# Altium PCB PAYL0006_PC_Overview_Block.PcbDoc (part 1 of 2)
Units mm, origin at the board's own origin, x right, y up, seen from the top; angles counter-clockwise.
Board outline 116.4 x 100.9 mm, 6 copper layers (Top Layer, MidLayer1, VSUP1_PLANE, GND_PLANE, VSUP3_PLANE, Bottom Layer); 172 components, 183 nets, 811 pads, 237 vias.
Unrouted connection lines stored in the file: 35.
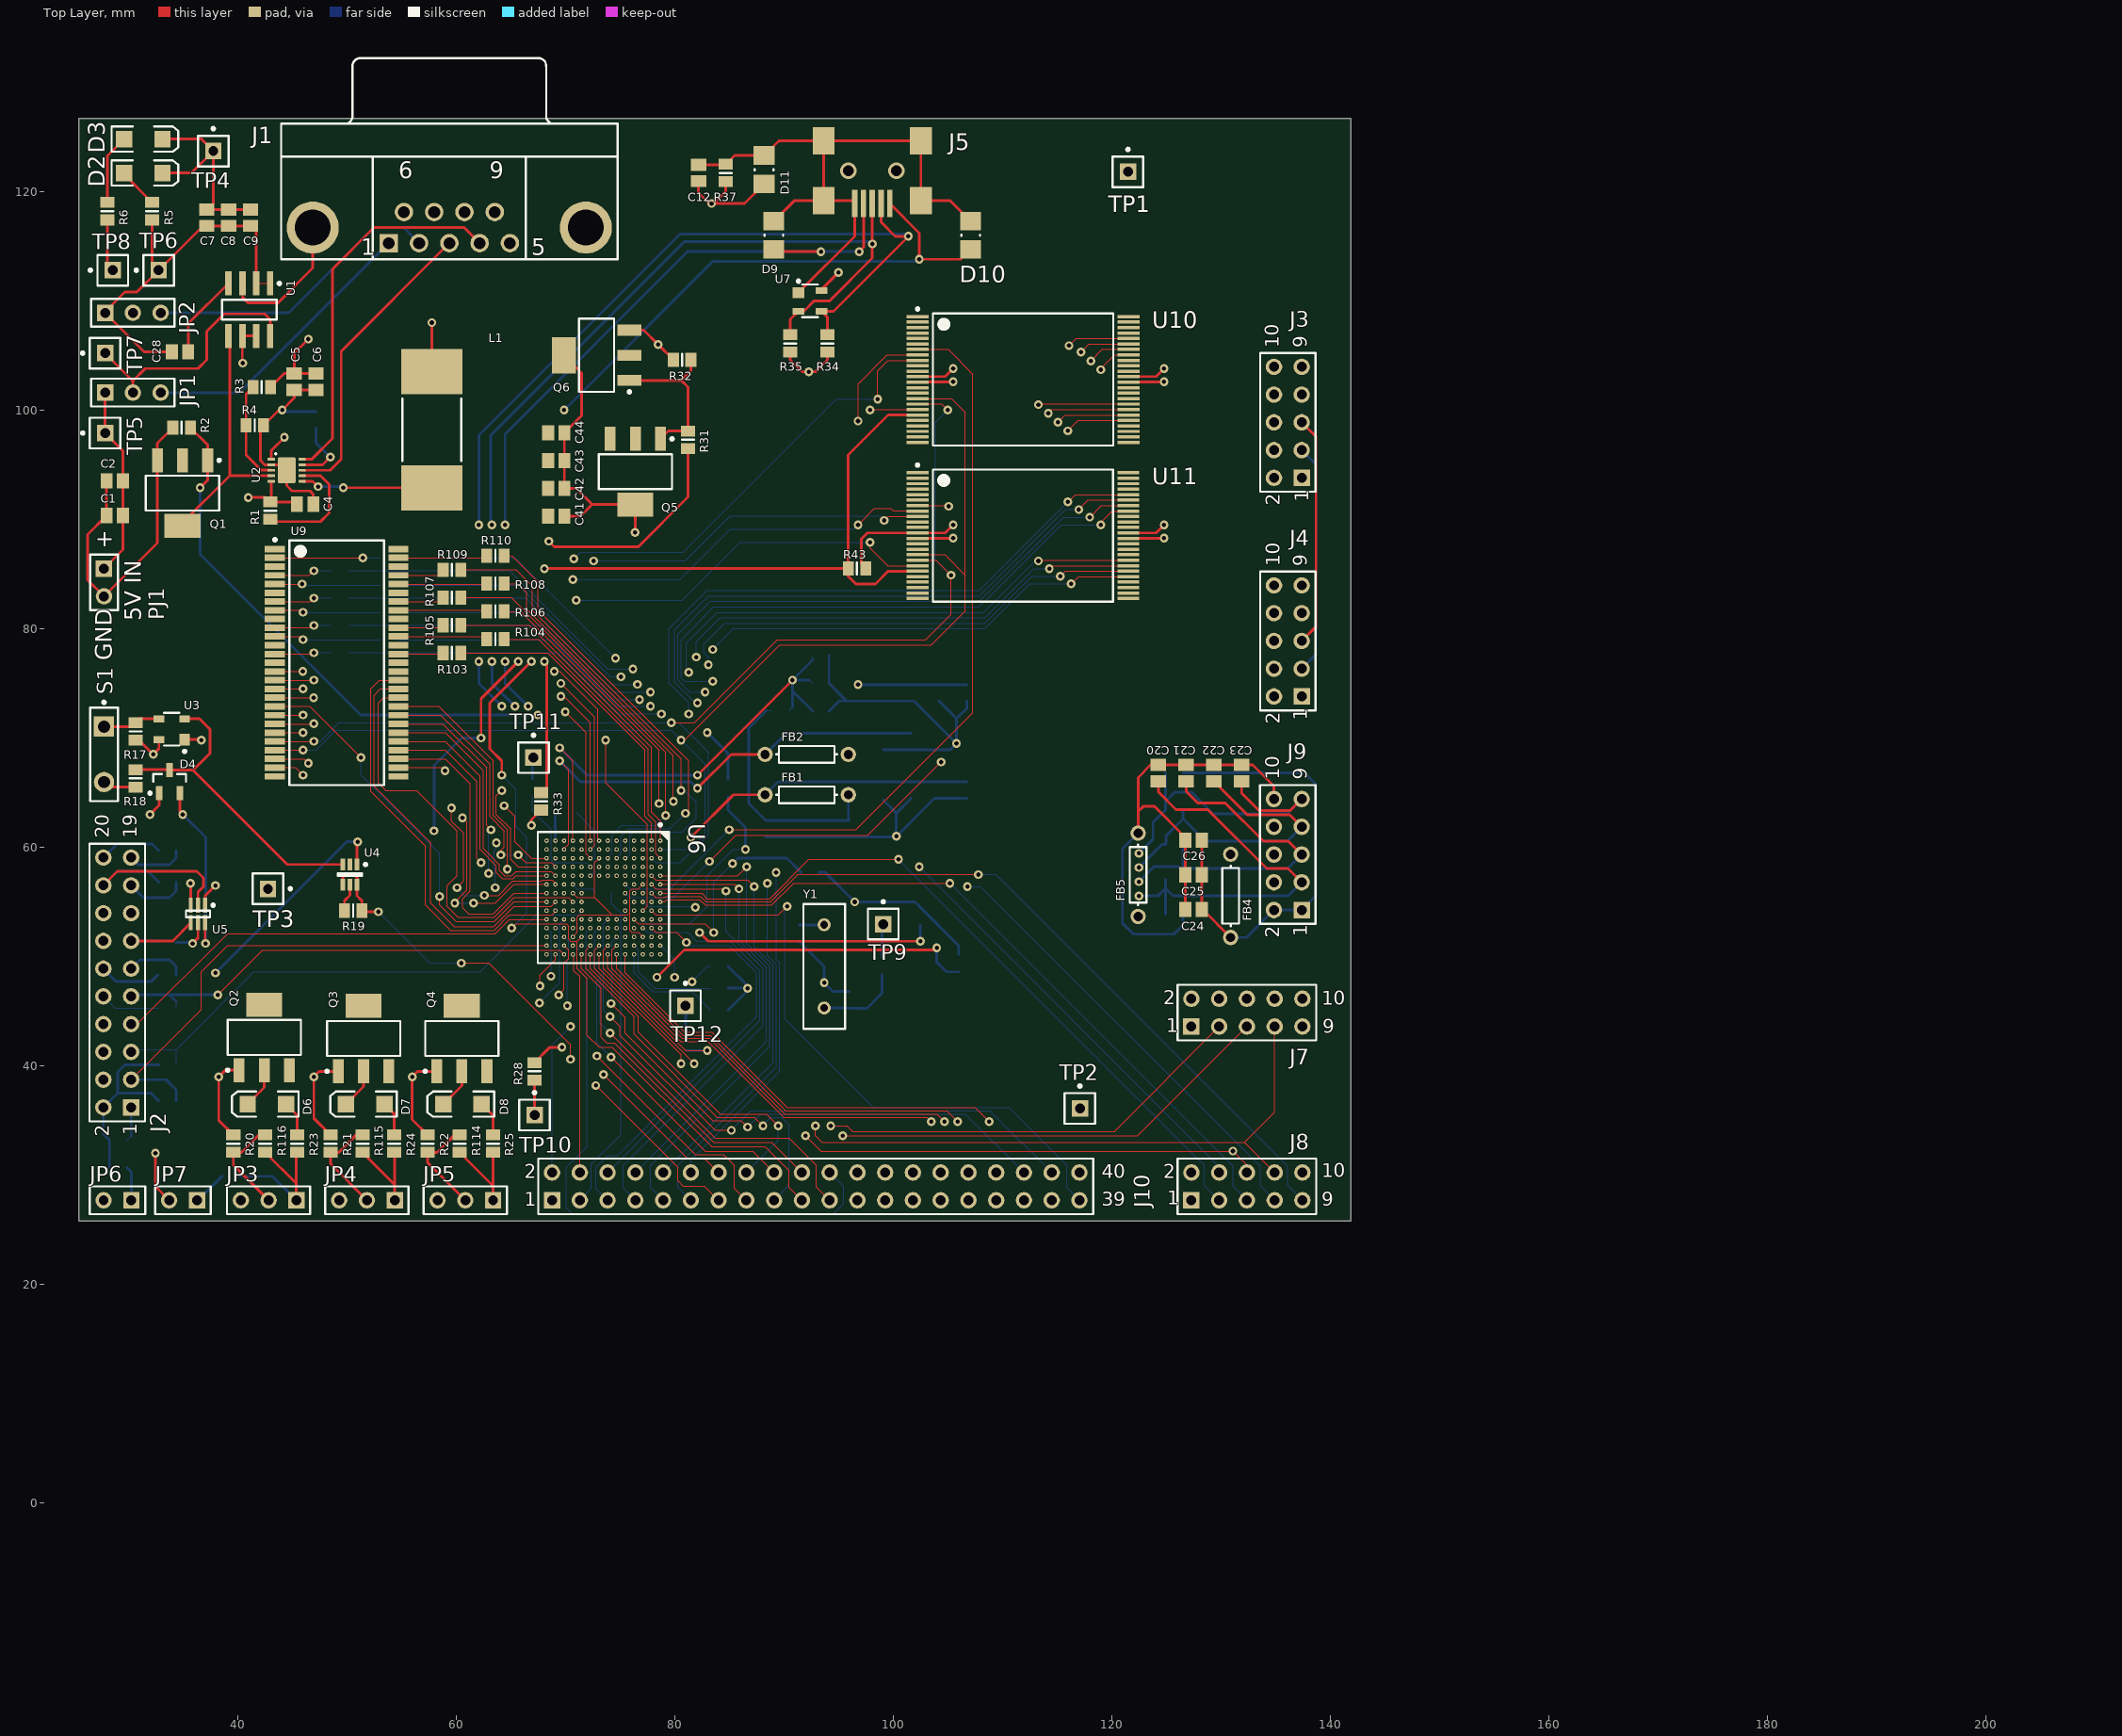
[diagram p0: Top Layer view]
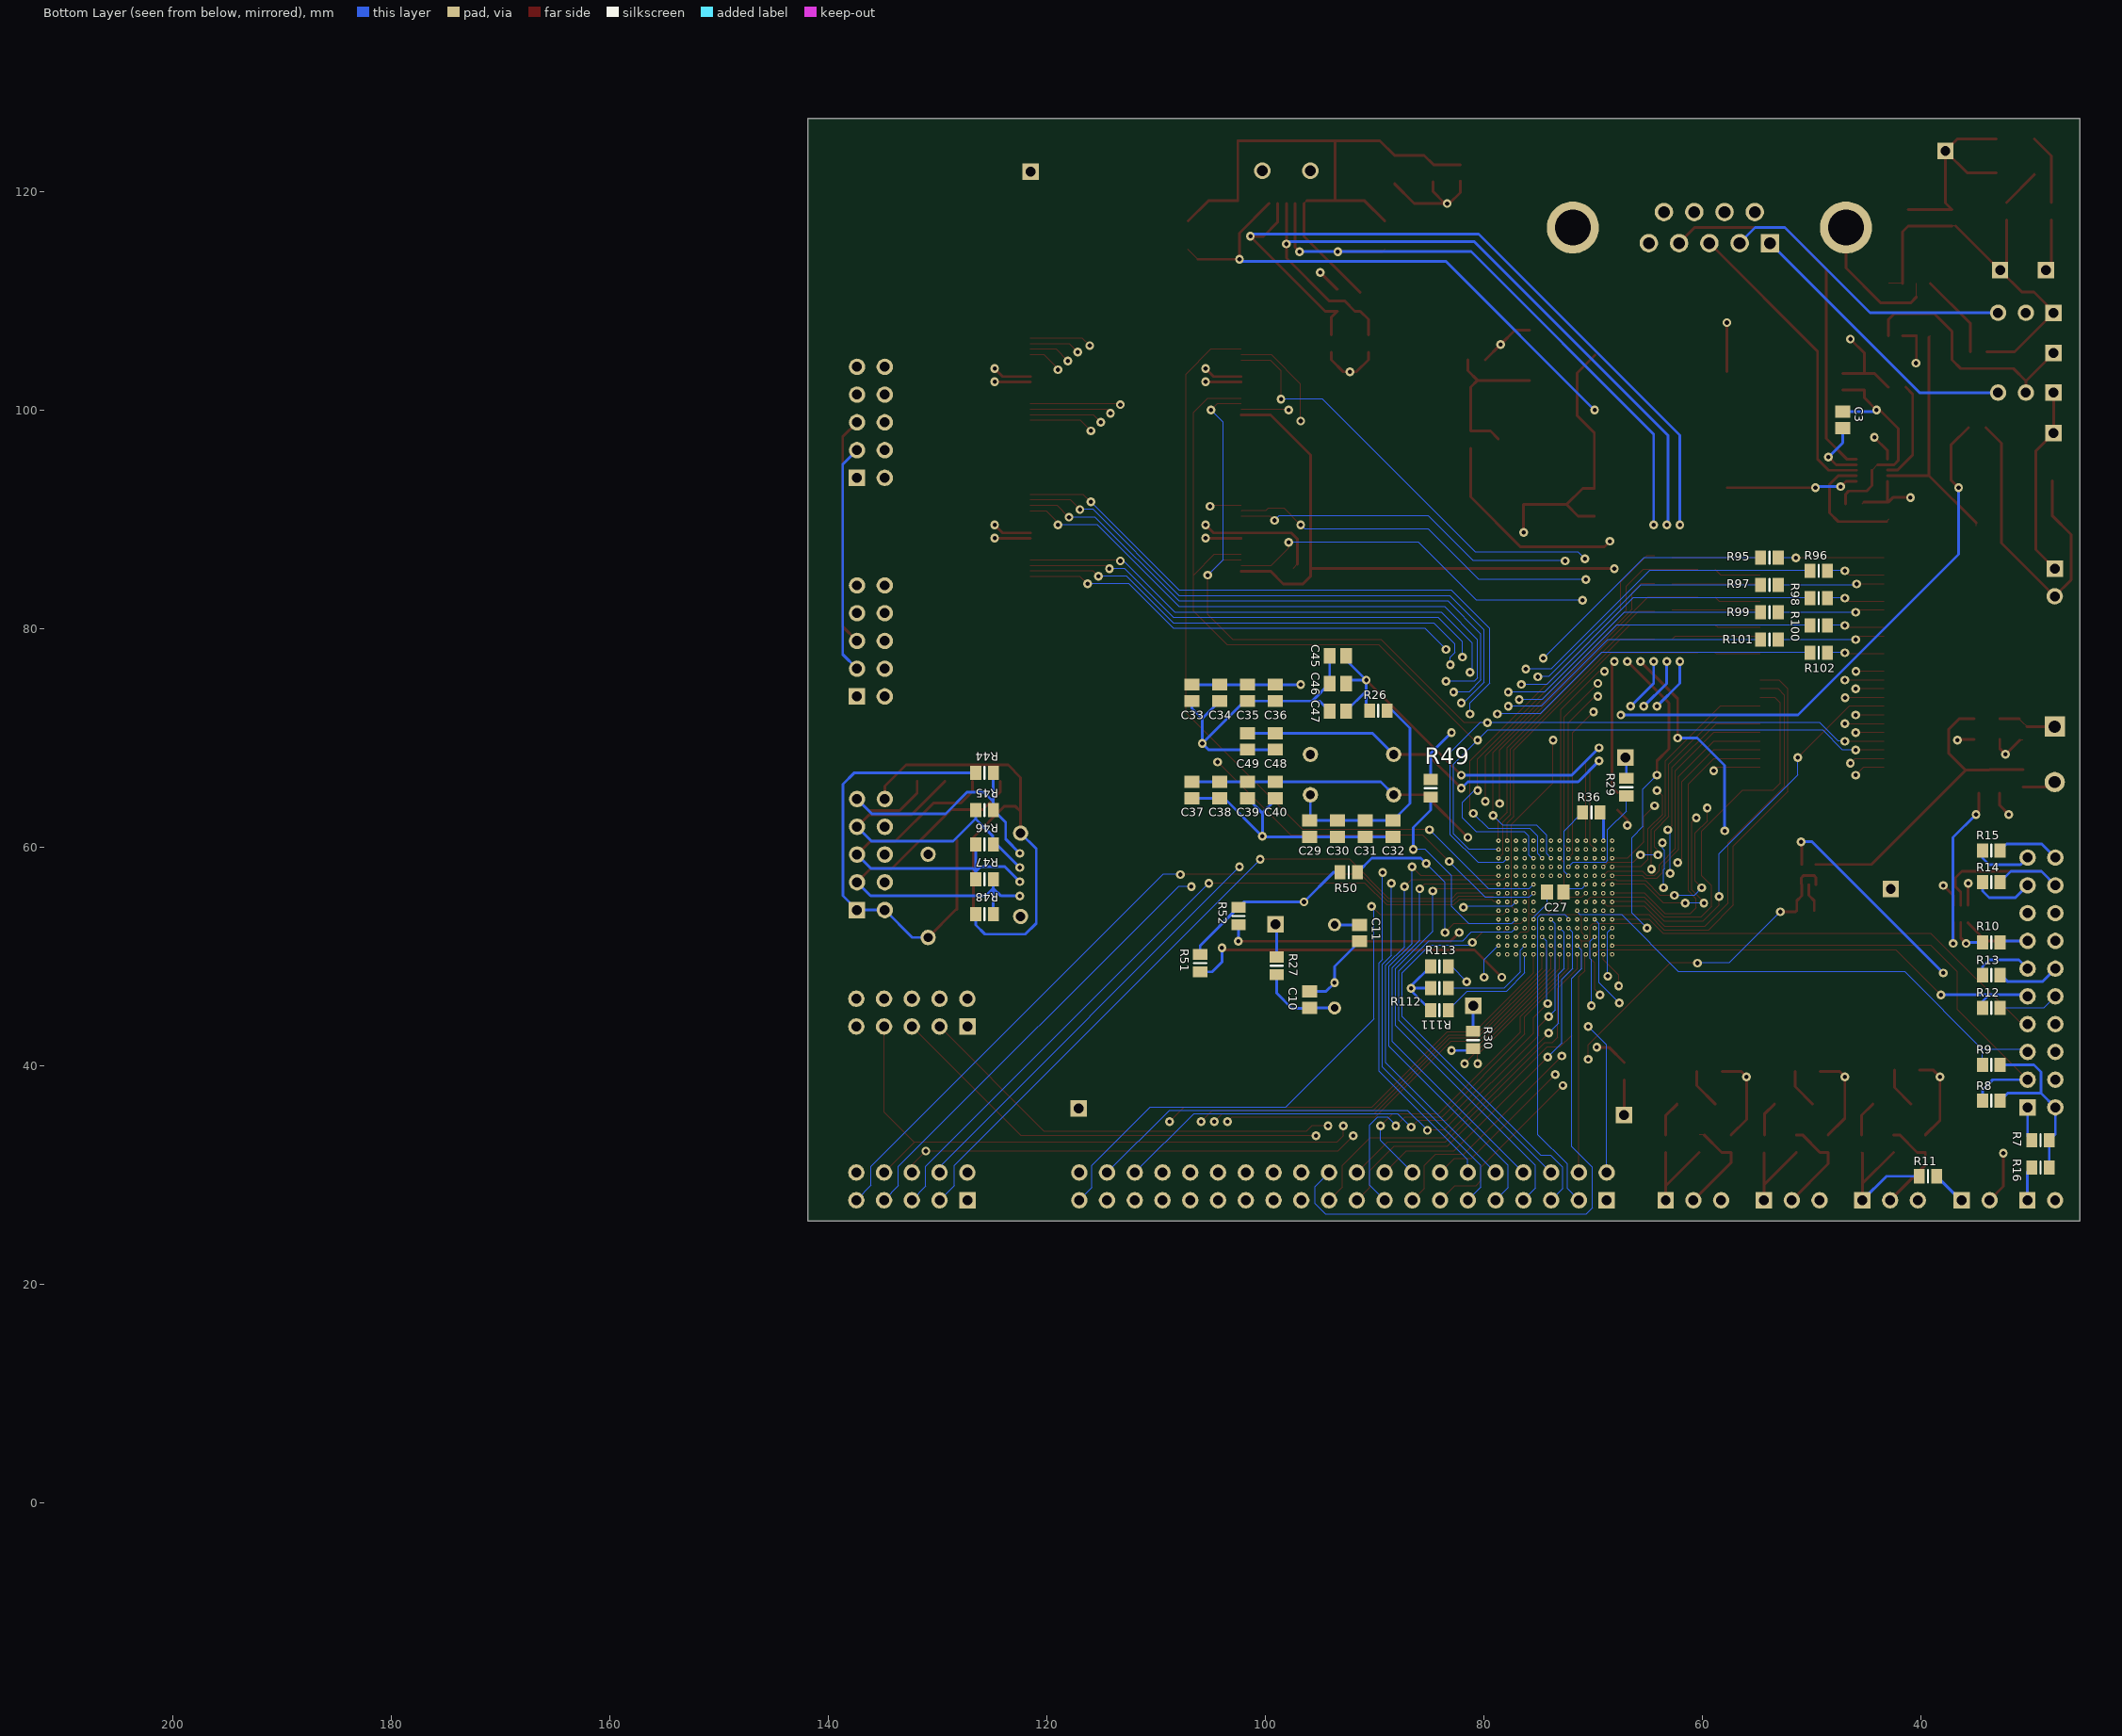
[diagram p1: Bottom Layer view, seen from below]
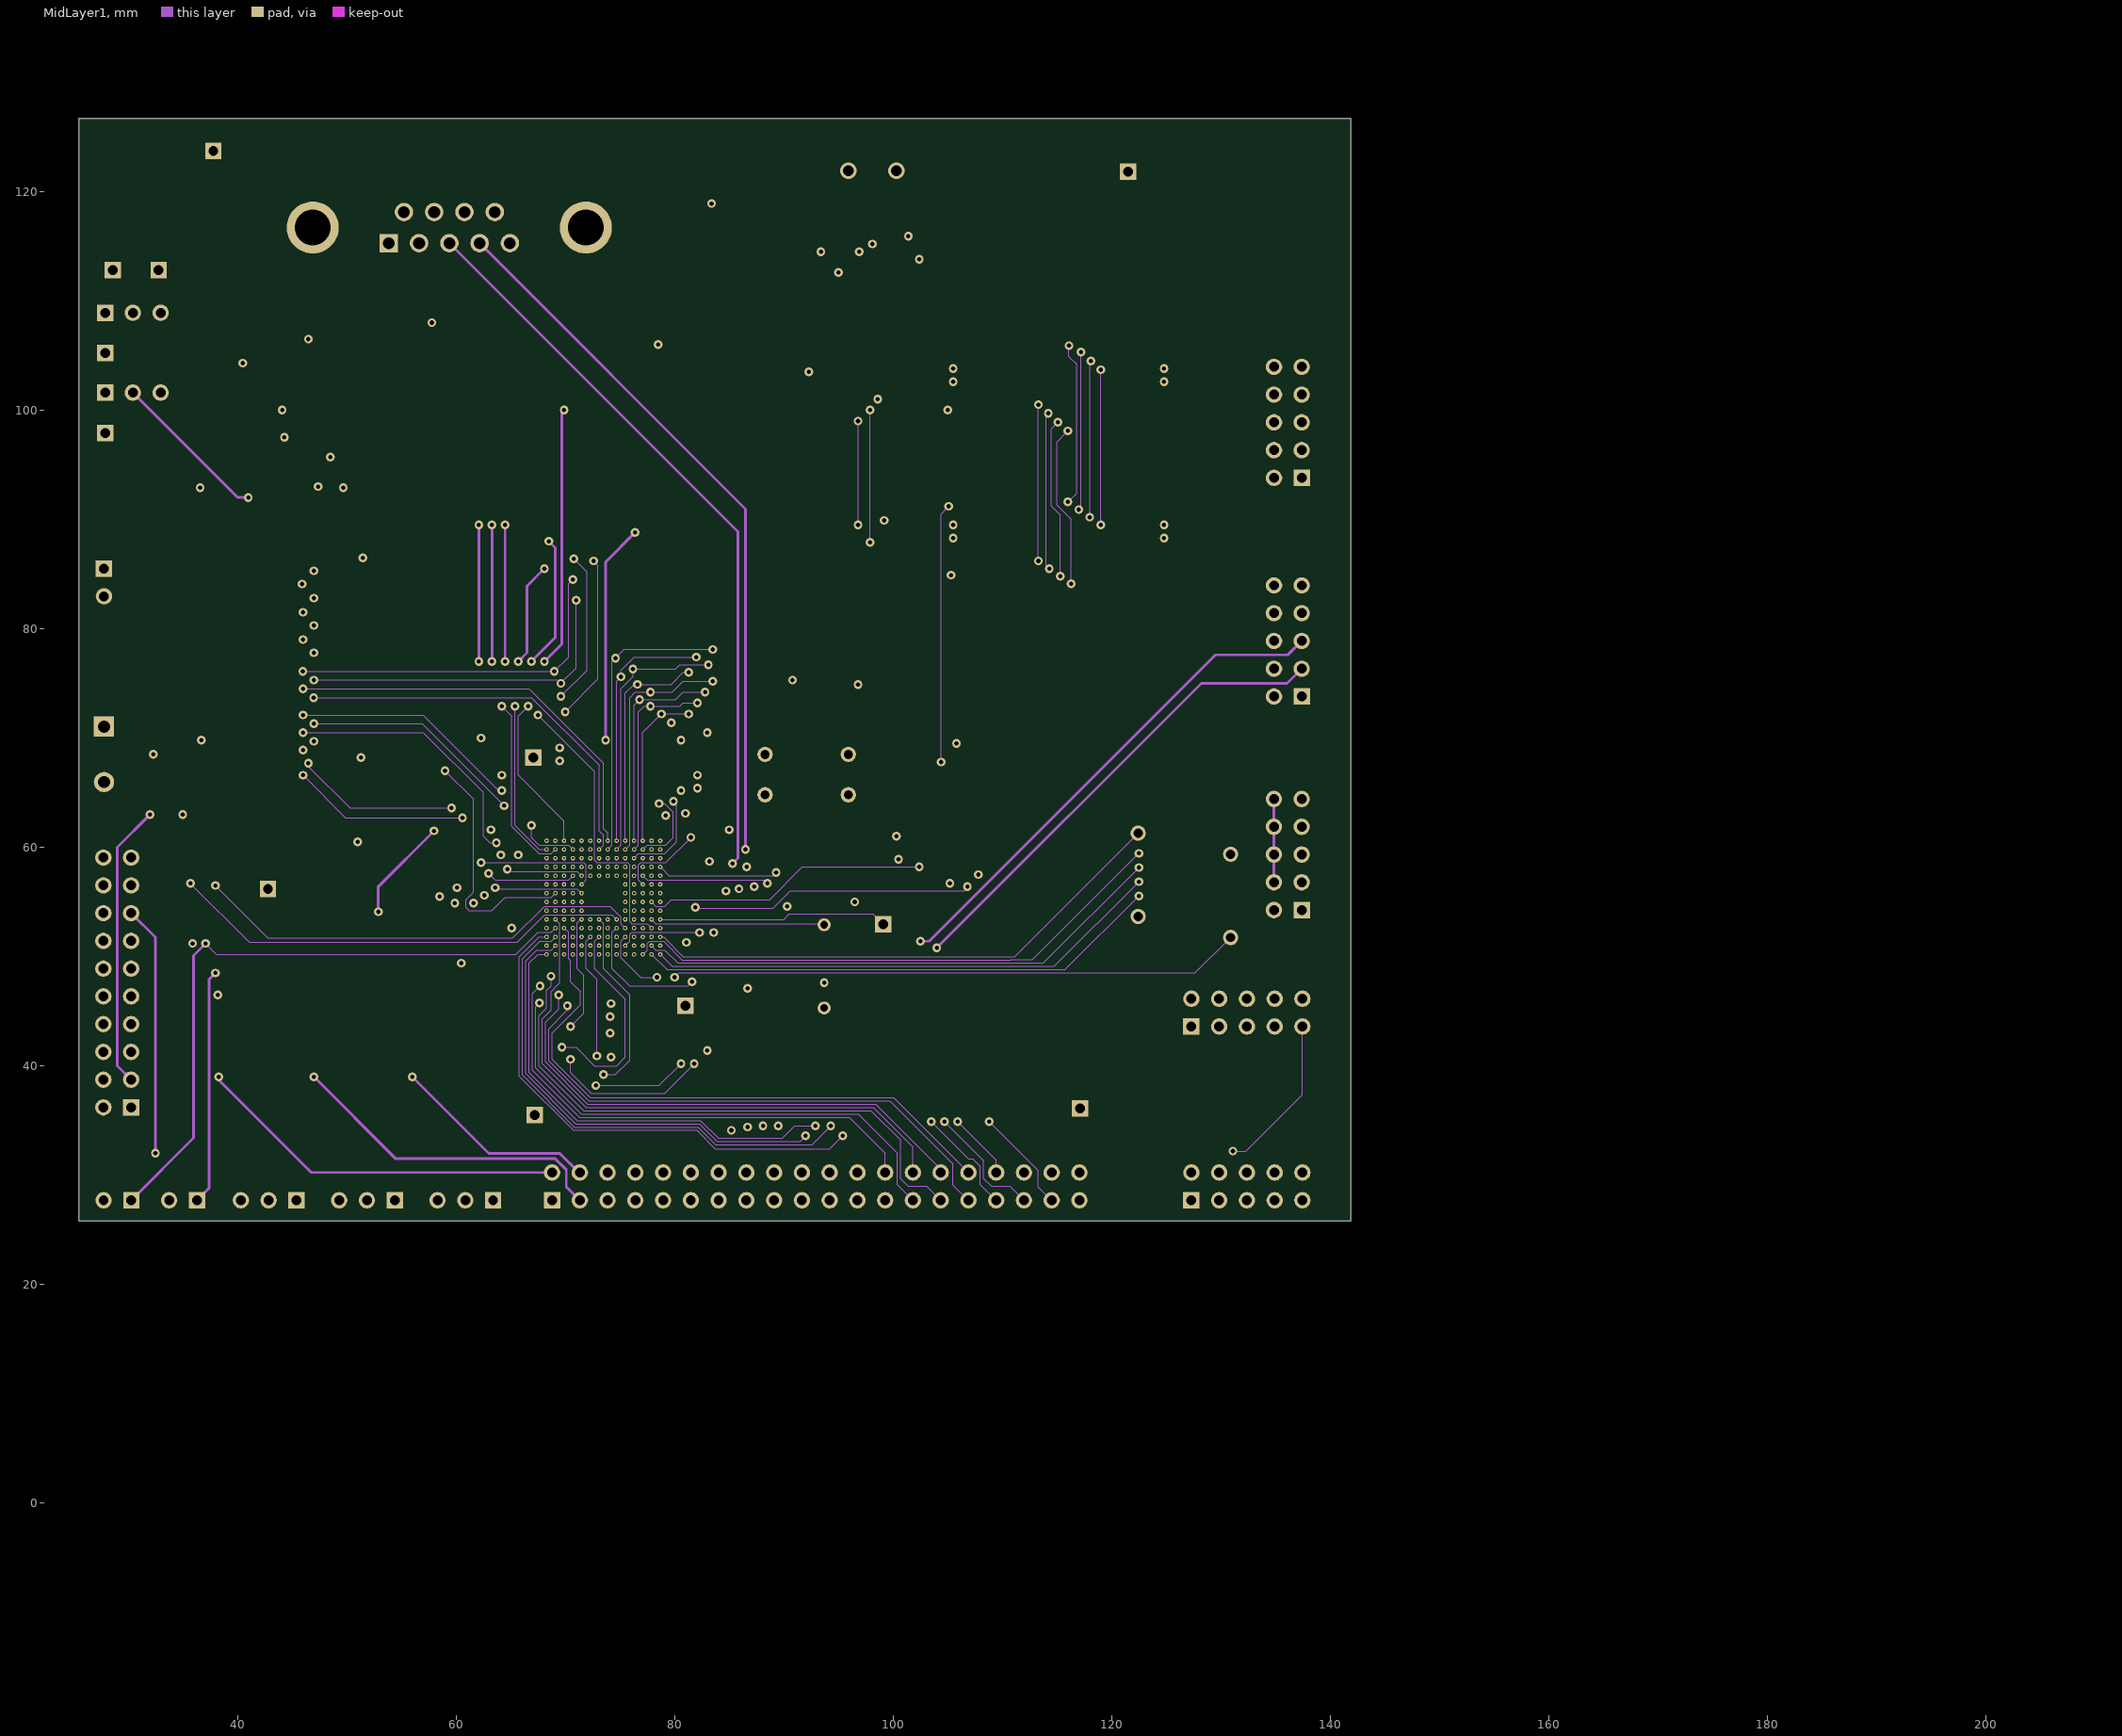
[diagram p2: MidLayer1]
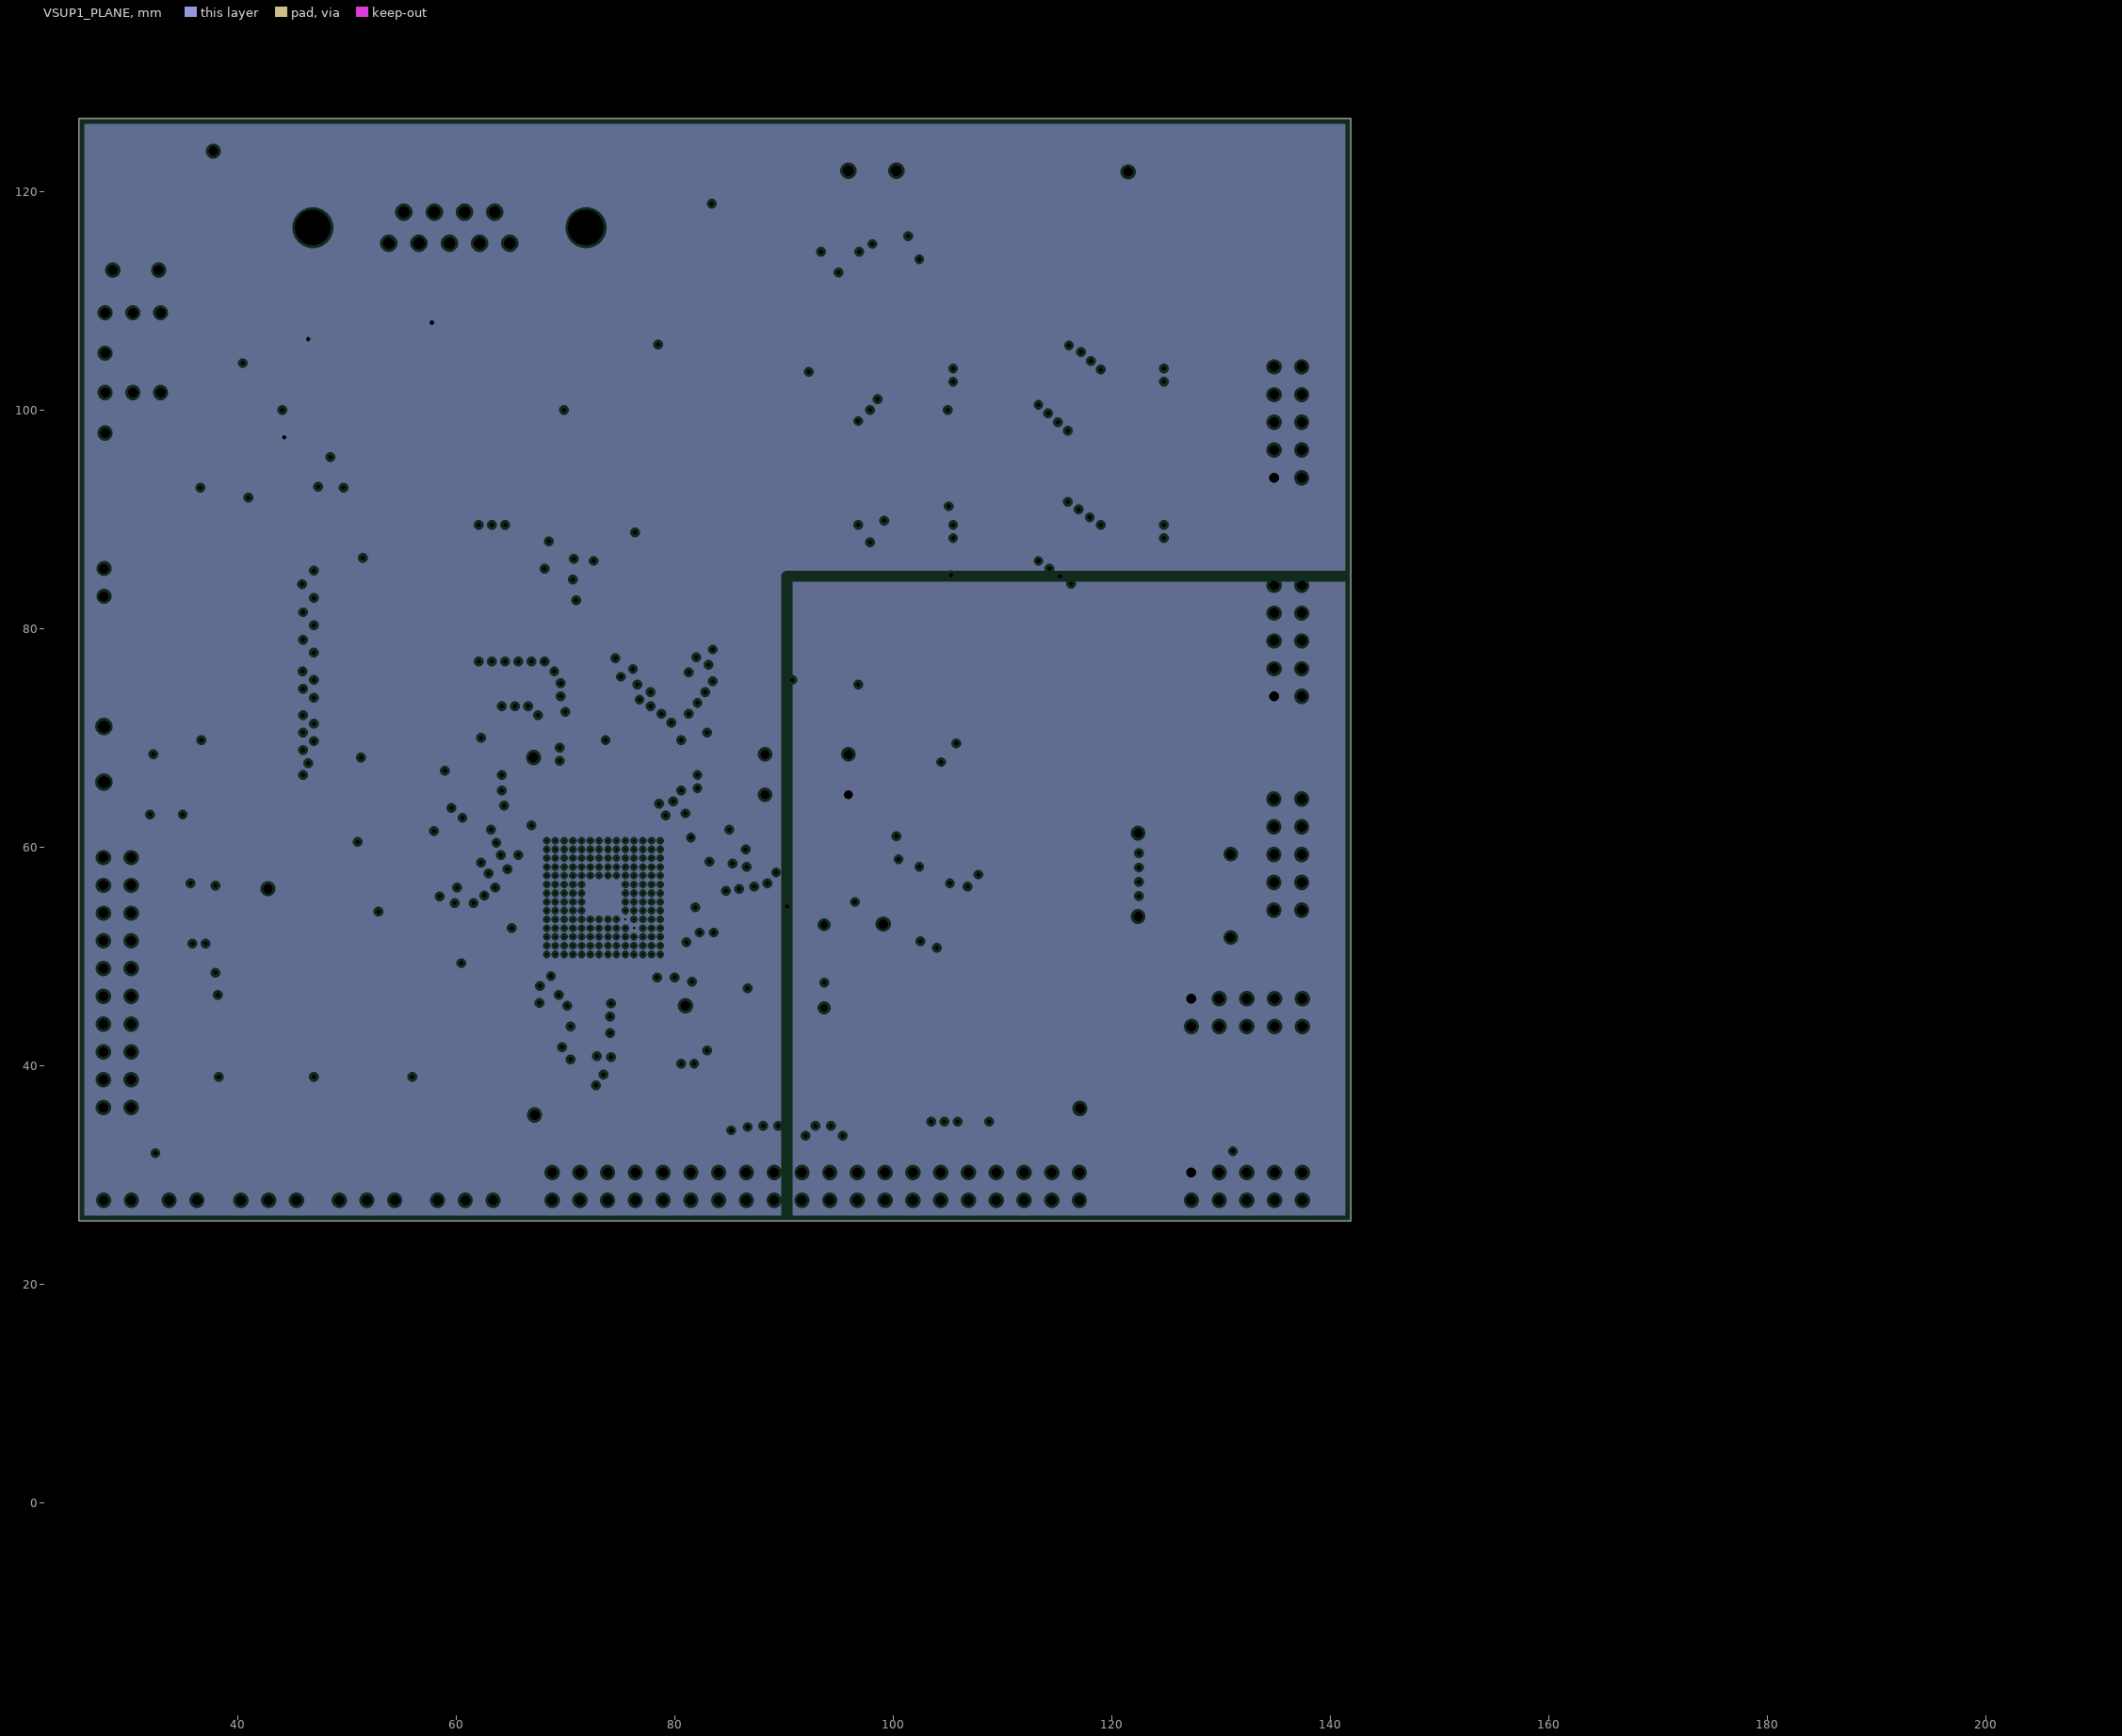
[diagram p3: VSUP1_PLANE, clearances drawn from the general rule]
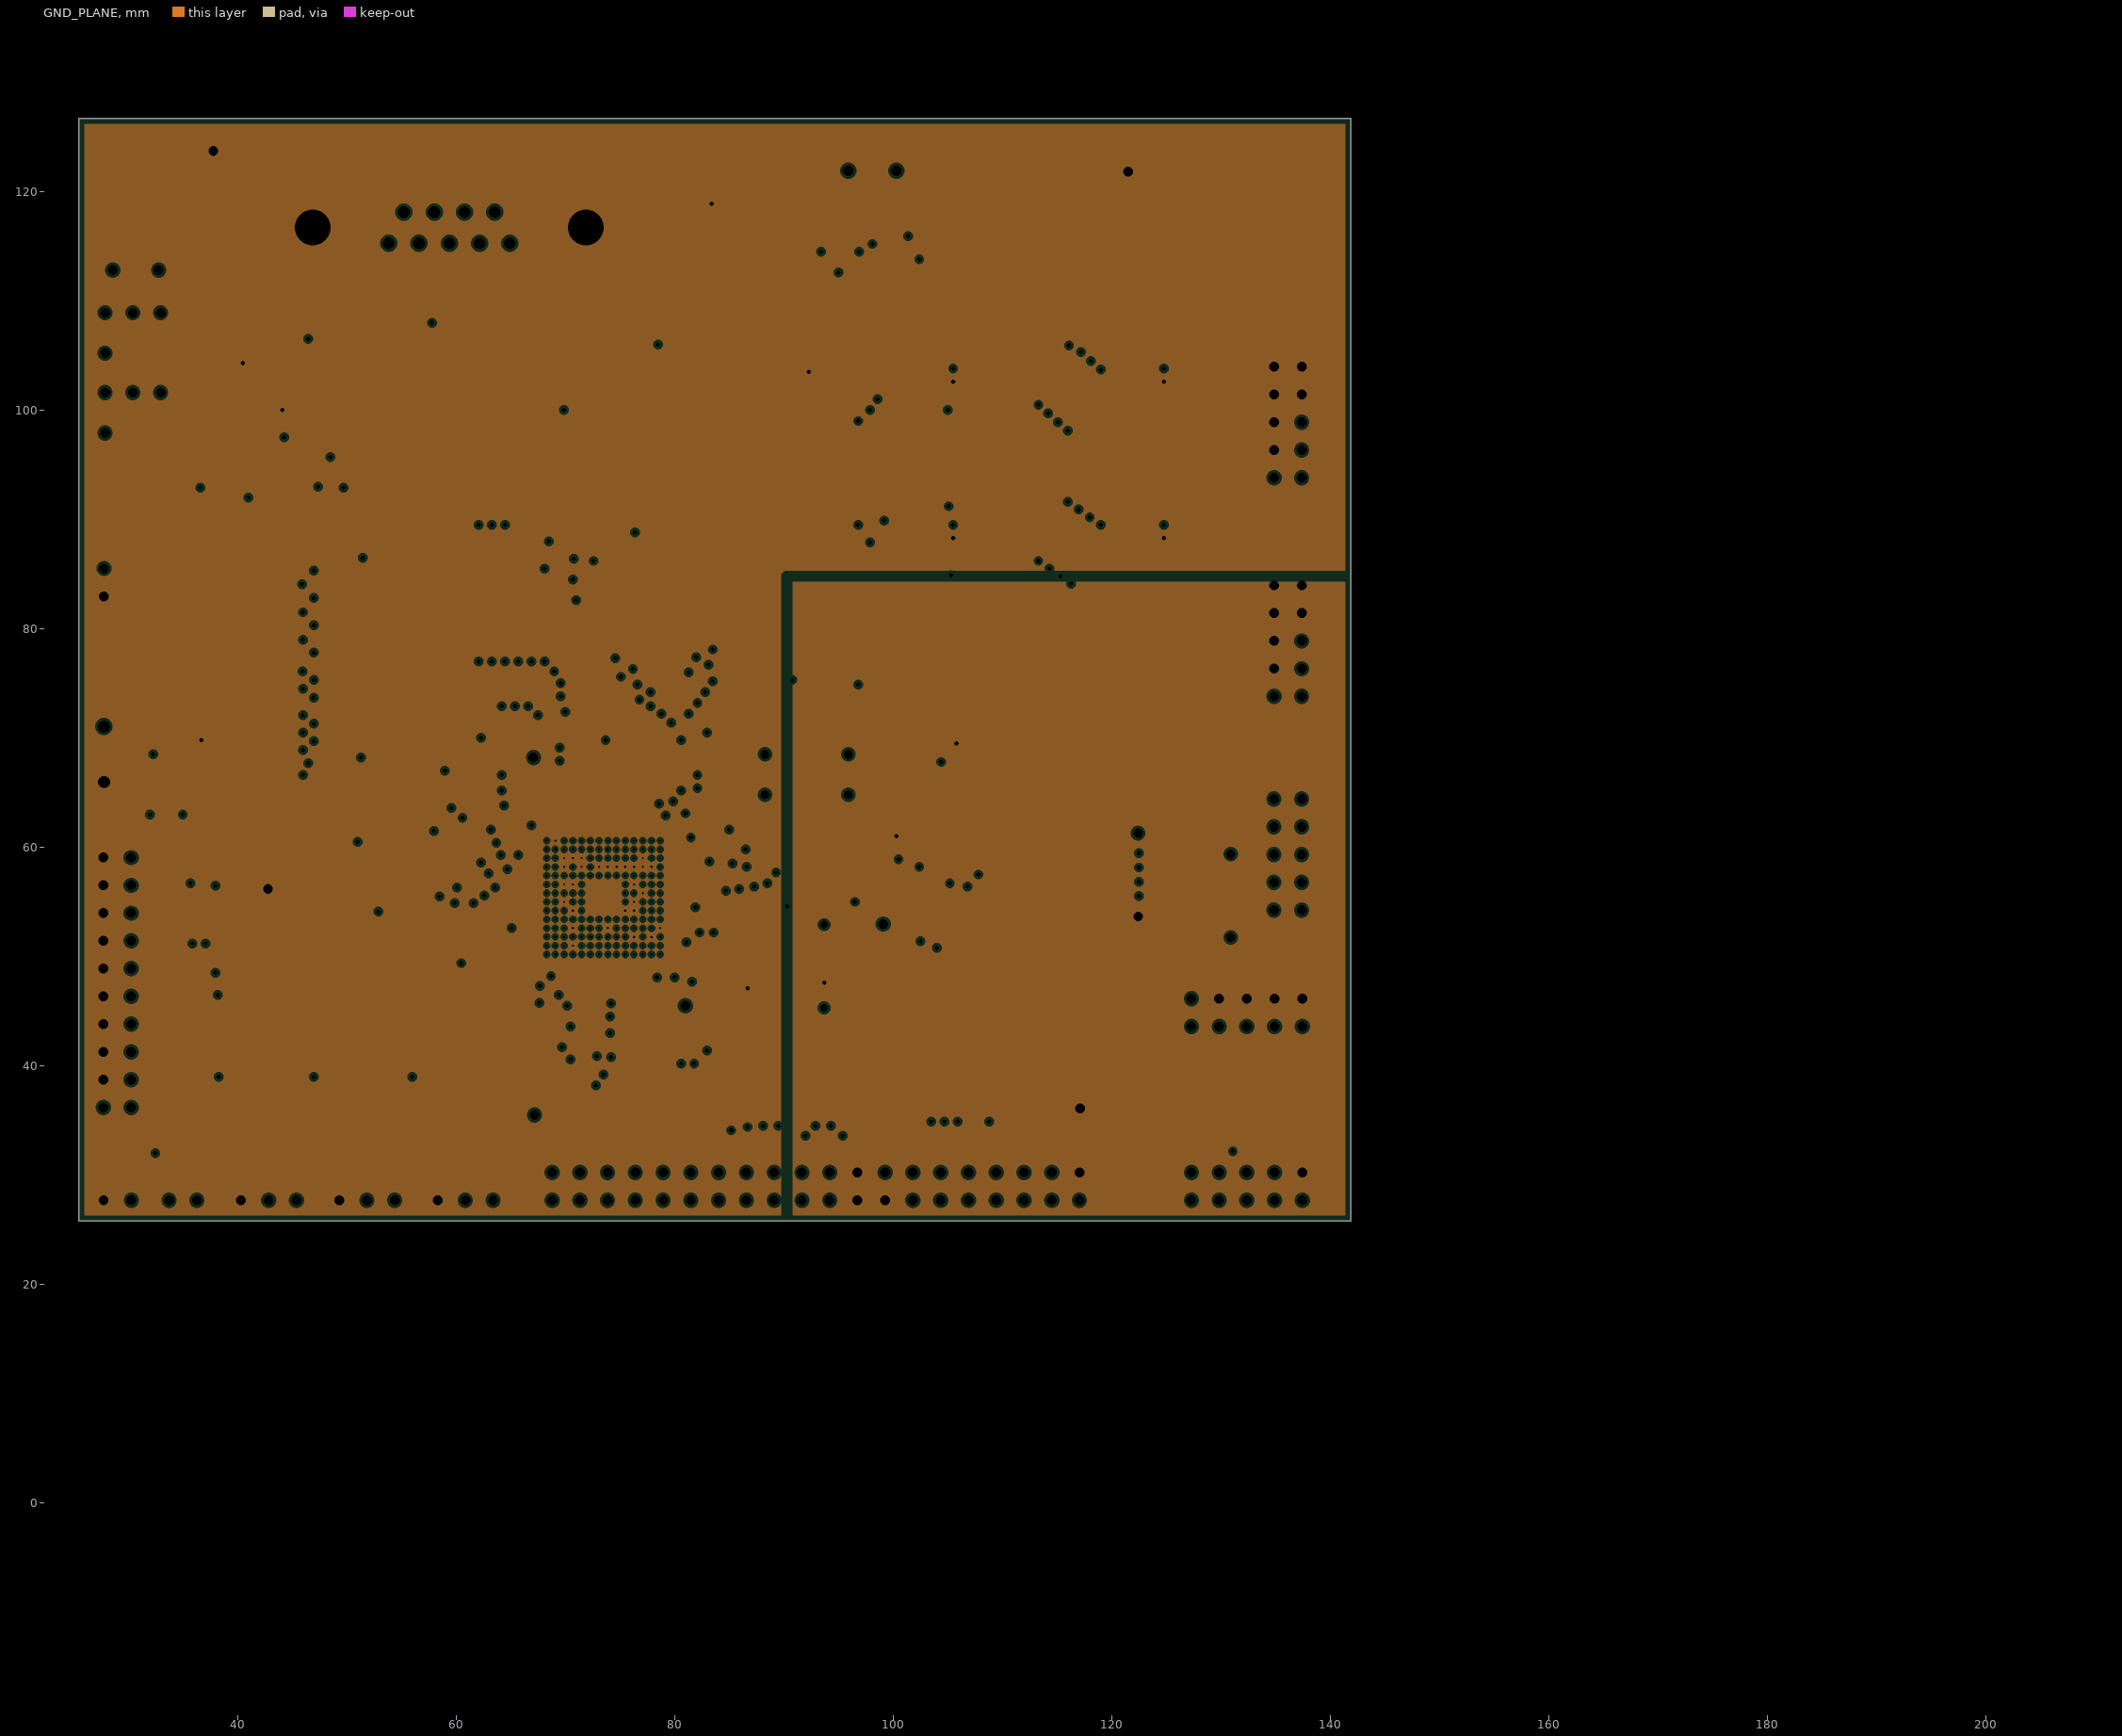
[diagram p4: GND_PLANE, clearances drawn from the general rule]
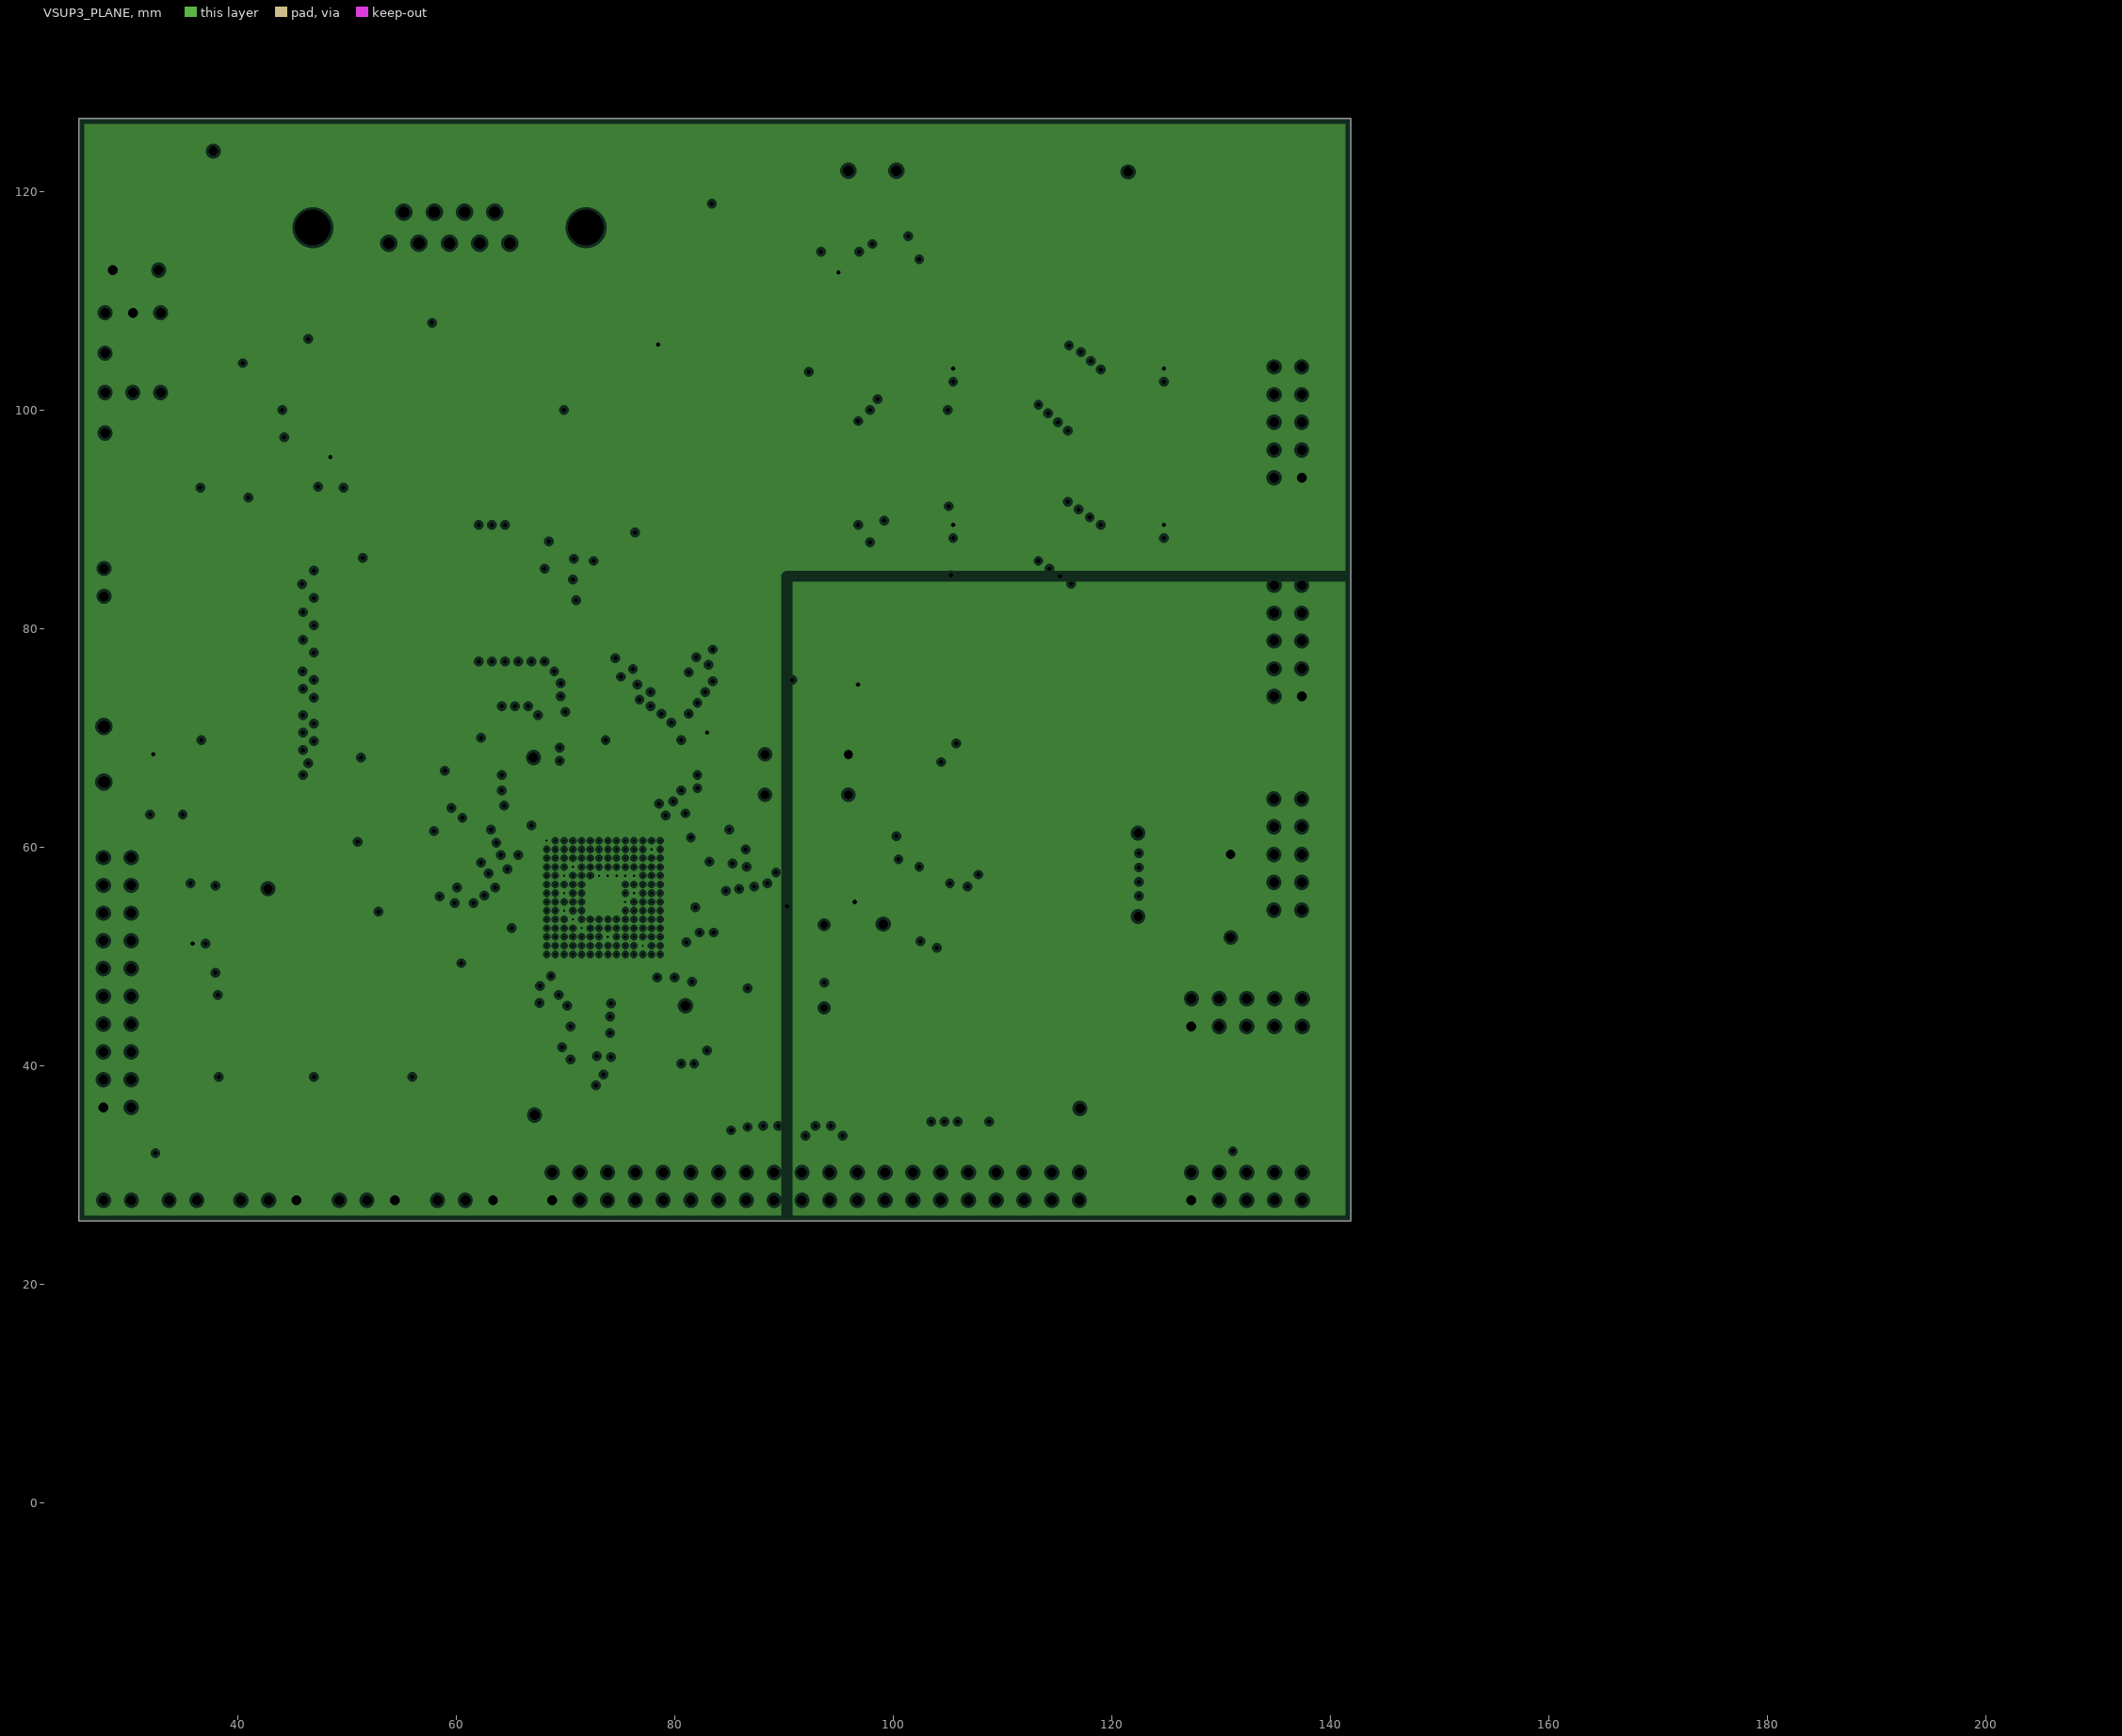
[diagram p5: VSUP3_PLANE, clearances drawn from the general rule]

## Layer stack, top to bottom
Top Layer: signal copper 0.0356
Dielectric: core 0.32, FR-4, Dk 4.8
MidLayer1: signal copper 0.0356
Dielectric: prepreg 0.32, FR-4, Dk 4.8
VSUP1_PLANE: plane copper 0.0356, net VSUP1
Dielectric: core 0.32, FR-4, Dk 4.8
GND_PLANE: plane copper 0.0356, net GND
Dielectric: prepreg 0.32, FR-4, Dk 4.8
VSUP3_PLANE: plane copper 0.0356, net VSUP3
Dielectric: core 0.32, FR-4, Dk 4.8
Bottom Layer: signal copper 0.0356

## Board outline
25.5,25.8 141.9,25.8 141.9,126.7 25.5,126.7

## Design rules (kind name [scope] priority, off if disabled: settings)
Clearance [All] p1: gap=0.15
HoleSize [All] p1: absolutevalues=TRUE maxlimit=3.26 minlimit=0.025 maxpercent=80.000 minpercent=20.000
MinimumSolderMaskSliver [All] p1: minsoldermaskwidth=0.15
PlaneClearance [All] p1: clearance=0.25
PlaneConnect [All] p1: planeconnectstyle=Direct reliefexpansion=0.508 reliefentries=4 reliefconductorwidth=0.254 reliefairgap=0.1
PolygonConnect [All] p1: connectstyle=Relief reliefconductorwidth=0.254 reliefentries=4 polygonreliefangle="90 Angle"
RoomDefinition "Payload Computer - Microcontroller Power" [InComponentClass('Payload Computer - Microcontroller Power')] p1: confinementstyle=ConfineIn formatcopy=TRUE lockcomponents=FALSE outline 54.4,26 163.6,26 163.6,111.9 54.4,111.9
RoomDefinition "Payload Computer - JTAG Interface and Reset" [InComponentClass('Payload Computer - JTAG Interface and Reset')] p2: confinementstyle=ConfineIn formatcopy=TRUE lockcomponents=FALSE outline 25.7,25.781 102,25.781 102,80.5 25.7,80.5
RoomDefinition "Payload Computer - Power" [InComponentClass('Payload Computer - Power')] p3: confinementstyle=ConfineIn formatcopy=TRUE lockcomponents=FALSE outline 25.5,25.8 163.4,25.8 163.4,132.7 25.5,132.7
RoomDefinition "Payload Computer - Microcontroller IO Interfaces" [InComponentClass('Payload Computer - Microcontroller IO Interfaces')] p4: confinementstyle=ConfineIn formatcopy=TRUE lockcomponents=FALSE outline 64.9,126.7 64.9,26.289 163.8,26.289 163.8,126.7
RoomDefinition "Payload Computer - Memory" [InComponentClass('Payload Computer - Memory')] p5: confinementstyle=ConfineIn formatcopy=TRUE lockcomponents=FALSE outline 126.1,64.5 126.1,109.8 41.5,109.8 41.5,64.5
RoutingVias [All] p1: holewidth=0.4 width=0.8 viastyle="Through Hole" minholewidth=0.4 minwidth=0.8 maxholewidth=0.4 maxwidth=0.8
SilkToSilkClearance [All] p1: silktosilkclearance=0.15
SilkscreenOverComponentPads [All] p1: minsilkscreentomaskgap=0.1
SolderMaskExpansion [All] p1: expansion=0.102
Width [All] p1: maxlimit=0.25 minlimit=0.1 preferedwidth=0.1
22 further rules are at their usual default settings.

## Classes and differential pairs
component class "Payload Computer - Power": C1 C2 C3 C4 C5 C6 C7 C8 C9 C28 D2 D3 J1 JP1 JP2 L1 PJ1 Q1 R1 R2 R3 R4 R5 R6 TP1 TP2 TP3 TP4 TP5 TP6 TP7 TP8 U1 U2
component class "Payload Computer - Microcontroller Power": C10 C11 C20 C21 C22 C23 C24 C25 C26 C27 C29 C30 C31 C32 C33 C34 C35 C36 C37 C38 C39 C40 C41 C42 C43 C44 C45 C46 C47 C48 C49 FB1 FB2 FB4 FB5 J9 Q5 Q6 R26 R27 R28 R29 R30 R31 R32 R44 R45 R46 R47 R48 TP9 TP10 TP11 TP12 U6 Y1
component class "Payload Computer - Microcontroller IO Interfaces": C12 D9 D10 D11 J3 J4 J5 J7 J8 J10 R33 R34 R35 R36 R37 R49 R50 R51 R52 U7
component class "Payload Computer - Memory": R43 R95 R96 R97 R98 R99 R100 R101 R102 R103 R104 R105 R106 R107 R108 R109 R110 U9 U10 U11
component class "Payload Computer - JTAG Interface and Reset": D4 D6 D7 D8 J2 JP3 JP4 JP5 JP6 JP7 Q2 Q3 Q4 R7 R8 R9 R10 R11 R12 R13 R14 R15 R16 R17 R18 R19 R20 R21 R22 R23 R24 R25 R111 R112 R113 R114 R115 R116 S1 U3 U4 U5

## Components (designator, comment, footprint, x,y, rotation, side; value= is the part's Value field where it differs from the comment)
C1 "Cap Pol3" C0805 28.786,90.354 r180 top
C2 "Cap Semi" C0805 28.786,93.529 r0 top
C3 "Cap Semi" C0805 47.2,99.1 r90 bottom
C4 "Cap Semi" C0805 46.2,91.4 r180 top
C5 "Cap Semi" C0805 45.2,102.6 r270 top
C6 "Cap Semi" C0805 47.2,102.6 r270 top
C7 "Cap Semi" C0805 37.2,117.6 r90 top
C8 "Cap Semi" C0805 39.2,117.6 r90 top
C9 "Cap Semi" C0805 41.2,117.6 r90 top
C10 "Cap Semi" C0805 95.986,46.052 r90 bottom
C11 "Cap Semi" C0805 91.414,52.148 r90 bottom
C12 "Cap Semi" C0805 82.2,121.7 r90 top
C20 "Cap Semi" C0805 124.275,66.78 r270 top
C21 "Cap Semi" C0805 126.815,66.78 r270 top
C22 "Cap Semi" C0805 129.355,66.78 r270 top
C23 "Cap Semi" C0805 131.895,66.78 r270 top
C24 "Cap Semi" C0805 127.505,54.305 r0 top
C25 "Cap Semi" C0805 127.505,57.48 r0 top
C26 "Cap Semi" C0805 127.505,60.655 r0 top
C27 "Cap Semi" C0805 73.5,55.9 r0 bottom
C28 "Cap Semi" C0805 34.755,105.34 r180 top
C29 "Cap Semi" C0805 95.968,61.703 r270 bottom
C30 "Cap Semi" C0805 93.428,61.703 r270 bottom
C31 "Cap Semi" C0805 90.888,61.703 r270 bottom
C32 "Cap Semi" C0805 88.348,61.703 r270 bottom
C33 "Cap Semi" C0805 106.741,74.128 r270 bottom
C34 "Cap Semi" C0805 104.201,74.128 r270 bottom
C35 "Cap Semi" C0805 101.661,74.128 r270 bottom
C36 "Cap Semi" C0805 99.121,74.128 r270 bottom
C37 "Cap Semi" C0805 106.741,65.238 r270 bottom
C38 "Cap Semi" C0805 104.201,65.238 r270 bottom
C39 "Cap Semi" C0805 101.661,65.238 r270 bottom
C40 "Cap Semi" C0805 99.121,65.238 r270 bottom
C41 "Cap Semi" C0805 69.182,90.303 r180 top
C42 "Cap Semi" C0805 69.182,92.843 r180 top
C43 "Cap Semi" C0805 69.182,95.383 r180 top
C44 "Cap Semi" C0805 69.182,97.923 r180 top
C45 "Cap Semi" C0805 93.397,77.523 r0 bottom
C46 "Cap Semi" C0805 93.397,74.983 r0 bottom
C47 "Cap Semi" C0805 93.397,72.443 r0 bottom
C48 "Cap Semi" C0805 99.121,69.683 r270 bottom
C49 "Cap Semi" C0805 101.661,69.683 r270 bottom
D2 "LED2" DSO-F2/D6.1 31.4,121.7 r0 top
D3 "LED2" DSO-F2/D6.1 31.4,124.8 r0 top
D4 "BAT54C" SOT23_N 33.8,66 r90 top
D6 "LED2" DSO-F2/D6.1 42.7,36.5 r180 top
D7 "LED2" DSO-F2/D6.1 51.7,36.5 r180 top
D8 "LED2" DSO-F2/D6.1 60.6,36.5 r180 top
D9 "V5.5MLA" MLA-1206 89.1,116 r270 top
D10 "V5.5MLA" MLA-1206 107.1,116 r90 top
D11 "V5.5MLA" MLA-1206 88.2,122 r90 top
FB1 "Ferrite Bead" AXIAL-0.3 92.1,64.8 r0 top
FB2 "Ferrite Bead" AXIAL-0.3 92.1,68.5 r0 top
FB4 "Ferrite Bead" AXIAL-0.3 130.895,55.555 r270 top
FB5 "Ferrite Bead" AXIAL-0.3 122.425,57.48 r90 top
J1 "D Connector 9" DSUB1.385-2H9 59.4,126.2 r0 top
J2 "Header 10X2" HDR2X10 30.28,36.196 r90 top
J3 "Header 5X2" HDR2X5 137.4,93.8 r90 top
J4 "Header 5X2" HDR2X5 137.4,73.8 r90 top
J5 "Mini-AB Socket" miniUSB-AB 98.1,121.9 r180 top
J7 "Header 5X2" HDR2X5 127.3,43.6 r0 top
J8 "Header 5X2" HDR2X5 127.3,27.7 r0 top
J9 "Header 5X2" HDR2X5 137.395,54.255 r90 top
J10 "Header 20X2" HDR2X20 68.8,27.7 r0 top
JP1 "Jumper" HDR1X3 27.9,101.6 r0 top
JP2 "Jumper" HDR1X3 27.9,108.9 r0 top
JP3 "Jumper" HDR1X3 45.4,27.7 r180 top
JP4 "Jumper" HDR1X3 54.4,27.7 r180 top
JP5 "Jumper" HDR1X3 63.4,27.7 r180 top
JP6 "Jumper" HDR1X2 30.3,27.7 r180 top
JP7 "Jumper" HDR1X2 36.3,27.7 r180 top
L1 "Inductor" INDC13855X60N 57.8,98.2 r90 top
PJ1 "5V Input Pins (Lab Supply)" HDR1X2 27.8,85.5 r270 top
Q1 "BSP100" SOT223_N 34.982,92.406 r270 top
Q2 "BSP100" SOT223_N 42.463,42.601 r90 top
Q3 "BSP100" SOT223_N 51.553,42.501 r90 top
Q4 "BSP100" SOT223_N 60.543,42.501 r90 top
Q5 "BSP100" SOT223_N 76.421,94.367 r270 top
Q6 "BSP225" SOT223_N 72.867,105.019 r180 top
R1 "Res Semi" 6-0805_L 43,90.8 r90 top
R2 "Res Semi" 6-0805_L 34.9,98.4 r0 top
R3 "Res Semi" 6-0805_L 42.232,102.094 r0 top
R4 "Res Semi" 6-0805_L 41.6,98.6 r180 top
R5 "Res Semi" 6-0805_L 32.2,118.2 r270 top
R6 "Res Semi" 6-0805_L 28.1,118.2 r270 top
R7 "Res Semi" 6-0805_L 29.1,33.2 r180 bottom
R8 "Res Semi" 6-0805_L 33.6,36.8 r180 bottom
R9 "Res Semi" 6-0805_L 33.6,40.1 r180 bottom
R10 "Res Semi" 6-0805_L 33.6,51.3 r0 bottom
R11 "Res Semi" 6-0805_L 39.4,29.9 r0 bottom
R12 "Res Semi" 6-0805_L 33.6,45.3 r0 bottom
R13 "Res Semi" 6-0805_L 33.6,48.3 r0 bottom
R14 "Res Semi" 6-0805_L 33.6,56.8 r0 bottom
R15 "Res Semi" 6-0805_L 33.6,59.7 r0 bottom
R16 "Res Semi" 6-0805_L 29.1,30.7 r180 bottom
R17 "Res Semi" 6-0805_L 30.7,70.6 r270 top
R18 "Res Semi" 6-0805_L 30.7,66.3 r90 top
R19 "Res Semi" 6-0805_L 50.6,54.2 r180 top
R20 "Res Semi" 6-0805_L 39.634,32.882 r270 top
R21 "Res Semi" 6-0805_L 48.524,32.882 r270 top
R22 "Res Semi" 6-0805_L 57.414,32.882 r270 top
R23 "Res Semi" 6-0805_L 45.476,32.882 r270 top
R24 "Res Semi" 6-0805_L 54.366,32.882 r270 top
R25 "Res Semi" 6-0805_L 63.383,32.882 r270 top
R26 "Res Semi" 6-0805_L 89.7,72.5 r0 bottom
R27 "Res Semi" 6-0805_L 98.978,49.155 r270 bottom
R28 "Res Semi" 6-0805_L 67.2,39.5 r90 top
R29 "Res Semi" 6-0805_L 67,65.5 r270 bottom
R30 "Res Semi" 6-0805_L 81.018,42.362 r270 bottom
R31 "Res Semi" 6-0805_L 81.247,97.288 r270 top
R32 "Res Semi" 6-0805_L 80.7,104.6 r0 top
R33 "Res Semi" 6-0805_L 67.8,64.2 r90 top
R34 "Res Semi" 6-0805_L 94,106.1 r90 top
R35 "Res Semi" 6-0805_L 90.6,106.1 r90 top
R36 "Res Semi" 6-0805_L 70.2,63.2 r0 bottom
R37 "Res Semi" 6-0805_L 84.7,121.7 r90 top
R43 "Res Semi" 6-0805_L 96.7,85.5 r0 top
R44 "Res Semi" 6-0805_L 125.727,66.792 r0 bottom
R45 "Res Semi" 6-0805_L 125.727,63.417 r0 bottom
R46 "Res Semi" 6-0805_L 125.727,60.242 r180 bottom
R47 "Res Semi" 6-0805_L 125.727,57.067 r180 bottom
R48 "Res Semi" 6-0805_L 125.727,53.892 r180 bottom
R49 "Res Semi" 6-0805_L 84.9,65.4 r90 bottom
R50 "Res Semi" 6-0805_L 92.4,57.7 r0 bottom
R51 "Res Semi" 6-0805_L 106,49.4 r90 bottom
R52 "Res Semi" 6-0805_L 102.5,53.7 r90 bottom
R95 "Res Semi" 6-0805_L 53.9,86.5 r0 bottom
R96 "Res Semi" 6-0805_L 49.4,85.3 r0 bottom
R97 "Res Semi" 6-0805_L 53.9,84 r0 bottom
R98 "Res Semi" 6-0805_L 49.4,82.8 r0 bottom
R99 "Res Semi" 6-0805_L 53.9,81.5 r0 bottom
R100 "Res Semi" 6-0805_L 49.4,80.3 r0 bottom
R101 "Res Semi" 6-0805_L 53.9,79 r0 bottom
R102 "Res Semi" 6-0805_L 49.4,77.8 r0 bottom
R103 "Res Semi" 6-0805_L 59.634,77.774 r0 top
R104 "Res Semi" 6-0805_L 63.609,79.044 r0 top
R105 "Res Semi" 6-0805_L 59.634,80.314 r0 top
R106 "Res Semi" 6-0805_L 63.609,81.584 r0 top
R107 "Res Semi" 6-0805_L 59.634,82.854 r0 top
R108 "Res Semi" 6-0805_L 63.609,84.124 r0 top
R109 "Res Semi" 6-0805_L 59.634,85.394 r0 top
R110 "Res Semi" 6-0805_L 63.609,86.664 r0 top
R111 "Res Semi" 6-0805_L 84.1,45.1 r180 bottom
R112 "Res Semi" 6-0805_L 84.1,47.1 r180 bottom
R113 "Res Semi" 6-0805_L 84.1,49.1 r180 bottom
R114 "Res Semi" 6-0805_L 60.335,32.882 r270 top
R115 "Res Semi" 6-0805_L 51.445,32.882 r270 top
R116 "Res Semi" 6-0805_L 42.555,32.882 r270 top
S1 "SW-PB" SPST-2 27.8,68.5 r270 top
TP1 "Test Point" PIN1 121.5,121.8 r0 top
TP2 "Test Point" PIN1 117.1,36.1 r0 top
TP3 "Test Point" PIN1 42.8,56.2 r270 top
TP4 "Test Point" PIN1 37.8,123.7 r0 top
TP5 "Test Point" PIN1 27.9,97.9 r90 top
TP6 "Test Point" PIN1 32.8,112.8 r90 top
TP7 "Test Point" PIN1 27.897,105.213 r90 top
TP8 "Test Point" PIN1 28.6,112.8 r90 top
TP9 "Test Point" PIN1 99.105,52.965 r0 top
TP10 "Test Point" PIN1 67.2,35.5 r0 top
TP11 "Test Point" PIN1 67.1,68.2 r0 top
TP12 "Test Point" PIN1 81,45.5 r0 top
U1 "LT1763" SOIC127P600X175-8N 41.089,109.187 r270 top
U2 "LTC3447EDD" LTC3447_DFP11 44.518,94.493 r270 top
U3 "ADM811" SOT190P230X102-4N 34,70.8 r180 top
U4 "74LVC2G07GW" SOT65P210X110-6M 50.3,57.5 r270 top
U5 "NC7SB3257" TSOP65P210X110-6N 36.4,53.9 r270 top
U6 "LPC3143" BGA180C80P14X14_1200X1200X120 73.5,55.4 r270 top
U7 "PRTR5V0U2X" SOT190P230X110-4N 92.4,110 r0 top
U9 "IS42S16160B" TSOP80P1180X120-54M 49.088,76.885 r0 top
U10 "NAND128W3A" TSSOP50P2000X120-48M 111.9,102.8 r0 top
U11 "NAND128W3A" TSSOP50P2000X120-48M 111.894,88.516 r0 top
Y1 "XTAL" RAD-0.3 93.7,49.1 r90 top

## Footprints (in the part's own frame and the unit in brackets; to place one, negate y for a bottom-side part, rotate by r counter-clockwise, add the part's x,y. Pads: shape width x height; smd on the part's side, far side on the other; paste and mask are expansions set on the pad)
6-0805_L [mm] "Chip Resistor, Body 2.0x1.2mm, IPC High Density"
  rect 1x1.3 smd: 1(-0.8,0) 2(0.8,0)
  silkscreen extent 0,-0.55 0,0.55, body extent -1.07,-0.7 1.07,0.7, height 0.7
AXIAL-0.3 [mm] "Axial Device, Thru-Hole; 2 Leads; 0.3 in Pin Spacing"
  round 1.4 hole 0.85: 1(-3.81,0) 2(3.81,0)
  silkscreen extent -2.77,-0.76 2.77,0.76
BGA180C80P14X14_1200X1200X120 [mm] "BGA, 180-Leads, Body 12.0x12.0mm,  Pitch 0.80mm"
  round 0.4 hole 0.2: A1(-5.2,5.2) A2(-4.4,5.2) A3(-3.6,5.2) A4(-2.8,5.2) A5(-2,5.2) A6(-1.2,5.2) A7(-0.4,5.2) A8(0.4,5.2) A9(1.2,5.2) A10(2,5.2) A11(2.8,5.2) A12(3.6,5.2) A13(4.4,5.2) A14(5.2,5.2) B1(-5.2,4.4) B2(-4.4,4.4) B3(-3.6,4.4) B4(-2.8,4.4) B5(-2,4.4) B6(-1.2,4.4) B7(-0.4,4.4) B8(0.4,4.4) B9(1.2,4.4) B10(2,4.4) B11(2.8,4.4) B12(3.6,4.4) B13(4.4,4.4) B14(5.2,4.4) C1(-5.2,3.6) C2(-4.4,3.6) C3(-3.6,3.6) C4(-2.8,3.6) C5(-2,3.6) C6(-1.2,3.6) C7(-0.4,3.6) C8(0.4,3.6) C9(1.2,3.6) C10(2,3.6) C11(2.8,3.6) C12(3.6,3.6) C13(4.4,3.6) C14(5.2,3.6) D1(-5.2,2.8) D2(-4.4,2.8) D3(-3.6,2.8) D4(-2.8,2.8) D5(-2,2.8) D6(-1.2,2.8) D7(-0.4,2.8) D8(0.4,2.8) D9(1.2,2.8) D10(2,2.8) D11(2.8,2.8) D12(3.6,2.8) D13(4.4,2.8) D14(5.2,2.8) E1(-5.2,2) E2(-4.4,2) E3(-3.6,2) E4(-2.8,2) E5(-2,2) E6(-1.2,2) E7(-0.4,2) E8(0.4,2) E9(1.2,2) E10(2,2) E11(2.8,2) E12(3.6,2) E13(4.4,2) E14(5.2,2) F1(-5.2,1.2) F2(-4.4,1.2) F3(-3.6,1.2) F4(-2.8,1.2) F5(-2,1.2) F10(2,1.2) F11(2.8,1.2) F12(3.6,1.2) F13(4.4,1.2) F14(5.2,1.2) G1(-5.2,0.4) G2(-4.4,0.4) G3(-3.6,0.4) G4(-2.8,0.4) G5(-2,0.4) G10(2,0.4) G11(2.8,0.4) G12(3.6,0.4) G13(4.4,0.4) G14(5.2,0.4) H1(-5.2,-0.4) H2(-4.4,-0.4) H3(-3.6,-0.4) H4(-2.8,-0.4) H5(-2,-0.4) H10(2,-0.4) H11(2.8,-0.4) H12(3.6,-0.4) H13(4.4,-0.4) H14(5.2,-0.4) J1(-5.2,-1.2) J2(-4.4,-1.2) J3(-3.6,-1.2) J4(-2.8,-1.2) J5(-2,-1.2) J10(2,-1.2) J11(2.8,-1.2) J12(3.6,-1.2) J13(4.4,-1.2) J14(5.2,-1.2) K1(-5.2,-2) K2(-4.4,-2) K3(-3.6,-2) K4(-2.8,-2) K5(-2,-2) K6(-1.2,-2) K7(-0.4,-2) K8(0.4,-2) K9(1.2,-2) K10(2,-2) K11(2.8,-2) K12(3.6,-2) K13(4.4,-2) K14(5.2,-2) L1(-5.2,-2.8) L2(-4.4,-2.8) L3(-3.6,-2.8) L4(-2.8,-2.8) L5(-2,-2.8) L6(-1.2,-2.8) L7(-0.4,-2.8) L8(0.4,-2.8) L9(1.2,-2.8) L10(2,-2.8) L11(2.8,-2.8) L12(3.6,-2.8) L13(4.4,-2.8) L14(5.2,-2.8) M1(-5.2,-3.6) M2(-4.4,-3.6) M3(-3.6,-3.6) M4(-2.8,-3.6) M5(-2,-3.6) M6(-1.2,-3.6) M7(-0.4,-3.6) M8(0.4,-3.6) M9(1.2,-3.6) M10(2,-3.6) M11(2.8,-3.6) M12(3.6,-3.6) M13(4.4,-3.6) M14(5.2,-3.6) N1(-5.2,-4.4) N2(-4.4,-4.4) N3(-3.6,-4.4) N4(-2.8,-4.4) N5(-2,-4.4) N6(-1.2,-4.4) N7(-0.4,-4.4) N8(0.4,-4.4) N9(1.2,-4.4) N10(2,-4.4) N11(2.8,-4.4) N12(3.6,-4.4) N13(4.4,-4.4) N14(5.2,-4.4) P1(-5.2,-5.2) P2(-4.4,-5.2) P3(-3.6,-5.2) P4(-2.8,-5.2) P5(-2,-5.2) P6(-1.2,-5.2) P7(-0.4,-5.2) P8(0.4,-5.2) P9(1.2,-5.2) P10(2,-5.2) P11(2.8,-5.2) P12(3.6,-5.2) P13(4.4,-5.2) P14(5.2,-5.2)
  silkscreen extent -6.77,-6 6,6, body extent -6,-6 6,6, height 1.2
C0805 [mm] "Chip Capacitor, Body 2.0x1.3mm, IPC High Density"
  rect 1.1x1.4 smd: 1(-0.75,0) 2(0.75,0)
  body extent -1.1,-0.72 1.1,0.72, height 1.4
DSO-F2/D6.1 [mm] "SMT LED; 2 Flat Leads"
  rect 1.5x1.5 smd: 1(-1.75,0) 2(1.75,0)
  silkscreen extent -2.9,-1.15 3.2,1.15
DSUB1.385-2H9 [mm] "Connector; D Subminiature; 9 Position; Right Angle; Pitch 1.385 mm"
  rect 1.69x1.69 hole 1.09: 1(-5.54,-10.92)
  round 1.69 hole 1.09: 2(-2.77,-10.92) 3(0,-10.92) 4(2.77,-10.92) 5(5.54,-10.92) 6(-4.155,-8.08) 7(-1.385,-8.08) 8(1.385,-8.08) 9(4.155,-8.08)
  round 4.76 hole 3.26: 10(-12.495,-9.5) 11(12.495,-9.5)
  silkscreen extent -15.4,-12.4 15.4,6
HDR1X2 [mm] "Connector; Header; 2 Position"
  rect 1.5x1.5 hole 0.9: 1(0,0)
  round 1.5 hole 0.9: 2(2.54,0)
  silkscreen extent -1.27,-1.27 3.81,1.27
HDR1X3 [mm] "Connector; Header; 3 Position"
  rect 1.5x1.5 hole 0.9: 1(0,0)
  round 1.5 hole 0.9: 2(2.54,0) 3(5.08,0)
  silkscreen extent -1.27,-1.27 6.35,1.27
HDR2X5 [mm] "Connector; Header; 5x2 Position"
  rect 1.5x1.5 hole 0.9: 1(0,0)
  round 1.5 hole 0.9: 2(0,2.54) 3(2.54,0) 4(2.54,2.54) 5(5.08,0) 6(5.08,2.54) 7(7.62,0) 8(7.62,2.54) 9(10.16,0) 10(10.16,2.54)
  silkscreen extent -1.27,-1.27 11.43,3.81
HDR2X10 [mm] "Connector; Header; 10x2 Position"
  rect 1.5x1.5 hole 0.9: 1(0,0)
  round 1.5 hole 0.9: 2(0,2.54) 3(2.54,0) 4(2.54,2.54) 5(5.08,0) 6(5.08,2.54) 7(7.62,0) 8(7.62,2.54) 9(10.16,0) 10(10.16,2.54) 11(12.7,0) 12(12.7,2.54) 13(15.24,0) 14(15.24,2.54) 15(17.78,0) 16(17.78,2.54) 17(20.32,0) 18(20.32,2.54) 19(22.86,0) 20(22.86,2.54)
  silkscreen extent -1.27,-1.27 24.13,3.81
HDR2X20 [mm] "Connector; Header; 20x2 Position"
  rect 1.5x1.5 hole 0.9: 1(0,0)
  round 1.5 hole 0.9: 2(0,2.54) 3(2.54,0) 4(2.54,2.54) 5(5.08,0) 6(5.08,2.54) 7(7.62,0) 8(7.62,2.54) 9(10.16,0) 10(10.16,2.54) 11(12.7,0) 12(12.7,2.54) 13(15.24,0) 14(15.24,2.54) 15(17.78,0) 16(17.78,2.54) 17(20.32,0) 18(20.32,2.54) 19(22.86,0) 20(22.86,2.54) 21(25.4,0) 22(25.4,2.54) 23(27.94,0) 24(27.94,2.54) 25(30.48,0) 26(30.48,2.54) 27(33.02,0) 28(33.02,2.54) 29(35.56,0) 30(35.56,2.54) 31(38.1,0) 32(38.1,2.54) 33(40.64,0) 34(40.64,2.54) 35(43.18,0) 36(43.18,2.54) 37(45.72,0) 38(45.72,2.54) 39(48.26,0) 40(48.26,2.54)
  silkscreen extent -1.27,-1.27 49.53,3.81
INDC13855X60N [mm] "Chip Inductor, 2-Leads, Body 13.8x5.5mm, IPC Medium Density"
  rect 4.15x5.6 smd: 1(-5.325,0) 2(5.325,0)
  silkscreen extent -2.85,-2.7 2.85,2.7, body extent -6.9,-2.75 6.9,2.75, height 6
LTC3447_DFP11 [mm]
  rect 0.25x0.675 smd mask+0.05: 1(-1,-1.412) 2(-0.5,-1.412) 3(0,-1.412) 4(0.5,-1.412) 5(1,-1.412) 6(1,1.413) 7(0.5,1.413) 8(0,1.413) 9(-0.5,1.413) 10(-1,1.413)
  rrect20% 2.38x1.65 smd mask+0.05: 11(0,0)
  silkscreen extent -1.51,-1.01 -1.49,-0.98
miniUSB-AB [mm]
  rect 0.5x2.5 smd: 1(-1.6,3) 2(-0.8,3) 3(0,3) 4(0.8,3) 5(1.6,3)
  rect 2x2.5 smd mask+0.1: 6(-4.45,-2.75) 7(4.45,-2.75) 8(-4.45,2.75) 9(4.45,2.75)
MLA-1206 [mm] "Chip Resistor, 2-Leads, Body 3.2x1.6mm, IPC Medium Density"
  rect 1.7x1.9 smd: 1(-1.3,0) 2(1.3,0)
  silkscreen extent -0.05,-0.85 0.05,0.85, body extent -1.75,-0.94 1.75,0.94, height 1.8
PIN1 [mm] "Connector; Plug"
  rect 1.5x1.5 hole 0.9: 1(0,0)
  silkscreen extent -1.4,-1.4 1.4,2.17
RAD-0.3 [mm] "Radial Cap, Thru-Hole; 2 Leads; 0.3 in Pin Spacing"
  round 1.2 hole 0.7: 1(-3.81,0) 2(3.81,0)
  silkscreen extent -5.72,-1.9 5.71,1.91
SOIC127P600X175-8N [mm] "SOIC, 8-Leads, Body 5.0x4.0mm (max), Pitch 1.27mm, IPC Medium Density"
  rect 2.2x0.6 smd: 1(-2.4,1.905) 2(-2.4,0.635) 3(-2.4,-0.635) 4(-2.4,-1.905) 5(2.4,-1.905) 6(2.4,-0.635) 7(2.4,0.635) 8(2.4,1.905)
  silkscreen extent -2.52,-2.5 0.9,2.88, body extent -1.99,-2.5 1.99,2.5, height 1.75
SOT23_N [mm] "SOT23, 3-Leads, Body 2.9x1.3mm, Pitch 0.95mm, Lead Span 2.3mm, IPC Medium Density"
  rect 1.3x0.6 smd: 1(-1.05,0.95) 2(-1.05,-0.95) 3(1.05,0)
  silkscreen extent -1.17,-1.5 0.7,1.92, body extent -0.7,-1.5 0.7,1.5, height 1.1
SOT65P210X110-6M [mm] "SOT23, 6-Leads, Body 2.2x2.2mm (max), Pitch 0.65mm, IPC Low Density"
  rect 1.05x0.45 smd: 1(-0.925,0.65) 2(-0.925,0) 3(-0.925,-0.65) 4(0.925,-0.65) 5(0.925,0) 6(0.925,0.65)
  silkscreen extent -1.05,-1.1 0.1,1.55, body extent -0.67,-1.1 0.67,1.1, height 1.1
SOT190P230X102-4N [mm] "SOT143, 4-Leads, Body 3.0x2.5mm (max), Pitch 1.90mm, IPC Medium Density"
  rect 0.95x1.05 smd: 1(-1.175,0.95)
  rect 0.95x0.65 smd: 2(-1.175,-0.95) 3(1.175,-0.95) 4(1.175,0.95)
  silkscreen extent -1.3,-1.5 0.7,2.15, body extent -0.7,-1.52 0.7,1.53, height 1.02
SOT190P230X110-4N [mm] "SOT143, 4-Leads, Body 3.0x2.5mm (max), Pitch 1.90mm, IPC Medium Density"
  rect 1.1x1 smd: 1(-1.05,0.75)
  rect 1.1x0.6 smd: 2(-1.05,-0.95) 3(1.05,-0.95) 4(1.05,0.95)
  silkscreen extent -1.17,-1.5 0.7,1.92, body extent -0.7,-1.5 0.7,1.5, height 1.1
SOT223_N [mm] "SOT223, 4-Leads, Body 6.5x3.5mm, Pitch 2.3mm, Lead Span 7mm, IPC Medium Density"
  rect 2.2x1 smd: 1(-3,2.3) 2(-3,0) 3(-3,-2.3)
  rect 2.2x3.3 smd: 4(3,0)
  silkscreen extent -3.12,-3.35 1.6,3.48, body extent -1.85,-3.35 1.85,3.35, height 1.8
SPST-2 [mm] "Circuit Breaker; 2 Leads"
  rect 1.85x1.85 hole 1.1: 1(-2.54,0)
  round 1.85 hole 1.1: 2(2.54,0)
  silkscreen extent -4.89,-1.27 4.28,1.27
TSOP65P210X110-6N [mm] "TSOP, 6-Leads, Body 2.2x1.4mm (max), Pitch 0.65mm, IPC Medium Density"
  rect 1.4x0.35 smd: 1(-0.8,0.65) 2(-0.8,0) 3(-0.8,-0.65) 4(0.8,-0.65) 5(0.8,0) 6(0.8,0.65)
  silkscreen extent -0.92,-1.1 0.3,1.5, body extent -0.67,-1.1 0.67,1.1, height 1.1
TSOP80P1180X120-54M [mm] "TSOP, 54-Leads, Body 22.4x10.3mm (max), Pitch 0.80mm, IPC Low Density"
  rect 1.85x0.6 smd: 1(-5.65,10.4) 2(-5.65,9.6) 3(-5.65,8.8) 4(-5.65,8) 5(-5.65,7.2) 6(-5.65,6.4) 7(-5.65,5.6) 8(-5.65,4.8) 9(-5.65,4) 10(-5.65,3.2) 11(-5.65,2.4) 12(-5.65,1.6) 13(-5.65,0.8) 14(-5.65,0) 15(-5.65,-0.8) 16(-5.65,-1.6) 17(-5.65,-2.4) 18(-5.65,-3.2) 19(-5.65,-4) 20(-5.65,-4.8) 21(-5.65,-5.6) 22(-5.65,-6.4) 23(-5.65,-7.2) 24(-5.65,-8) 25(-5.65,-8.8) 26(-5.65,-9.6) 27(-5.65,-10.4) 28(5.65,-10.4) 29(5.65,-9.6) 30(5.65,-8.8) 31(5.65,-8) 32(5.65,-7.2) 33(5.65,-6.4) 34(5.65,-5.6) 35(5.65,-4.8) 36(5.65,-4) 37(5.65,-3.2) 38(5.65,-2.4) 39(5.65,-1.6) 40(5.65,-0.8) 41(5.65,0) 42(5.65,0.8) 43(5.65,1.6) 44(5.65,2.4) 45(5.65,3.2) 46(5.65,4) 47(5.65,4.8) 48(5.65,5.6) 49(5.65,6.4) 50(5.65,7.2) 51(5.65,8) 52(5.65,8.8) 53(5.65,9.6) 54(5.65,10.4)
  silkscreen extent -5.77,-11.2 4.33,11.37, body extent -5.14,-11.21 5.15,11.21, height 1.2
TSSOP50P2000X120-48M [mm] "TSSOP, 48-Leads, Body 12.1x18.5mm (max), Pitch 0.50mm, IPC Low Density"
  rect 2x0.3 smd: 1(-9.65,5.75) 2(-9.65,5.25) 3(-9.65,4.75) 4(-9.65,4.25) 5(-9.65,3.75) 6(-9.65,3.25) 7(-9.65,2.75) 8(-9.65,2.25) 9(-9.65,1.75) 10(-9.65,1.25) 11(-9.65,0.75) 12(-9.65,0.25) 13(-9.65,-0.25) 14(-9.65,-0.75) 15(-9.65,-1.25) 16(-9.65,-1.75) 17(-9.65,-2.25) 18(-9.65,-2.75) 19(-9.65,-3.25) 20(-9.65,-3.75) 21(-9.65,-4.25) 22(-9.65,-4.75) 23(-9.65,-5.25) 24(-9.65,-5.75) 25(9.65,-5.75) 26(9.65,-5.25) 27(9.65,-4.75) 28(9.65,-4.25) 29(9.65,-3.75) 30(9.65,-3.25) 31(9.65,-2.75) 32(9.65,-2.25) 33(9.65,-1.75) 34(9.65,-1.25) 35(9.65,-0.75) 36(9.65,-0.25) 37(9.65,0.25) 38(9.65,0.75) 39(9.65,1.25) 40(9.65,1.75) 41(9.65,2.25) 42(9.65,2.75) 43(9.65,3.25) 44(9.65,3.75) 45(9.65,4.25) 46(9.65,4.75) 47(9.65,5.25) 48(9.65,5.75)
  silkscreen extent -9.77,-6.05 8.25,6.57, body extent -9.25,-6.05 9.25,6.05, height 1.2

## Part data
C1: "Polarized Capacitor (Surface Mount)"
C2 C3 C4 C5 C6 C7 C8 C9 C10 C11 C12 C20 C21 C22 C23 C24 C25 C26 C27 C28 C29 C30 C31 C32 C33 C34 C35 C36 C37 C38 C39 C40 C41 C42 C43 C44 C45 C46 C47 C48 C49: "Capacitor (Semiconductor SIM Model)"
D2 D3 D6 D7 D8: "Typical RED, GREEN, YELLOW, AMBER GaAs LED"
D4: "Schottky Barrier Double Diode"
D9 D10 D11: library part V5.5MLA0603, "Multilayer varistor - Transient voltage protection device"
FB1 FB2 FB4 FB5: "Standard Ferrite Bead"
J1: "Receptacle Assembly, 9 Position, Right Angle"
J2: "Header, 10-Pin, Dual row"
J3 J4 J7 J8 J9: "Header, 5-Pin, Dual row"
J5: library part miniUSB-AB, "MiniUSB AB type socket"
J10: "Header, 20-Pin, Dual row"
JP1 JP2 JP3 JP4 JP5: library part "2 position jumper", "3 pin jumper for selection"
JP6 JP7: "Jumper Wire"
PJ1: library part "Header 2", "Header, 2-Pin"
Q1 Q2 Q3 Q4 Q5: "N-channel Enhancement Mode MOSFET"
Q6: "P-channel Enhancement Mode Vertical D-MOSFET"
R1 R2 R3 R4 R5 R6 R7 R8 R9 R10 R11 R12 R13 R14 R15 R16 R17 R18 R19 R20 R21 R22 R23 R24 R25 R26 R27 R28 R29 R30 R31 R32 R33 R34 R35 R36 R37 R43 R44 R45 R46 R47 R48 R49 R50 R51 R52 R95 R96 R97 R98 R99 R100 R101 R102 R103 R104 R105 R106 R107 R108 R109 R110 R111 R112 R113 R114 R115 R116: "Semiconductor Resistor"
S1: "Switch"
TP1 TP2 TP3 TP4 TP5 TP6 TP7 TP8 TP9 TP10 TP11 TP12: "Test point"
U1: "Linear Technology Voltage Regulator"
U2: "I2C Controlled VReg"
U3: "Supervisory Circuit"
U4: "Non-inverting buffers with open-drain outputs"
U5: "2:1 Mux, Fairchild"
U6: "NXP ARM9 based microcontroller"
U7: "Electrostatic discharge protection diode IC - NXP"
U9: "16Mb x 16 (256Mb) Parallel Interface SDRAM"
U10 U11: "128Mb 8b wide NAND Flash"
Y1: "Crystal Oscillator"

## Via types
v1: diameter 0.8, hole 0.4, Top Layer to Bottom Layer, 235 vias
v2: diameter 1.5, hole 1, Top Layer to Bottom Layer, 2 vias

## Nets (pads, with @x,y where several pads share a name; then routed paths per layer and width w, separated by ;. In a path a pad name is that pad's centre, name@x,y a point inside that pad or via, vN(x,y) a via of type N, cw(c..) or ccw(c..) an arc to the next point about the centre after c; other vN are vias at no path point)
ADC10B_GPA0: C20.2 J9.3 R47.2 R48.2 U6.B14 | length 84.7
  Top Layer w0.25: C20.2@124.275,66.03 124.275,65.075 125.895,63.455 128.795,63.455 134.195,58.055 136.135,58.055 J9.3@137.395,56.795
  MidLayer1 w0.1: U6.B14@77.9,50.2 79.302,48.798 115.748,48.798 v1(122.495,55.545)
  Bottom Layer w0.1: R48.2@124.927,53.797 R48.2@124.927,53.892
  Bottom Layer w0.25: v1(122.495,55.545) 124.217,55.545 124.927,56.255 ; R48.2@124.927,53.892 124.927,56.255 ; R47.2@124.927,57.067 124.927,56.255 ; J9.3@137.395,56.795 136.155,55.555 125.627,55.555 124.927,56.255
ADC10B_GPA1: C21.2 J9.5 R46.1 R47.1 U6.A14 | length 80.8
  Top Layer w0.1: 136.195,60.535 136.195,60.555
  Top Layer w0.25: C21.2@126.815,66.03 126.815,65.135 127.895,64.055 130.395,64.055 133.895,60.555 136.195,60.555 ; 136.195,60.535 J9.5@137.395,59.335
  MidLayer1 w0.1: U6.A14@78.7,50.2 79.802,49.098 114.748,49.098 v1(122.495,56.845)
  Bottom Layer w0.1: R47.1@126.527,57.067 126.527,57.787
  Bottom Layer w0.25: v1(122.495,56.845) 123.895,58.245 126.069,58.245 126.527,57.787 ; R46.1@126.527,60.242 126.527,57.787 ; J9.5@137.395,59.335 136.115,58.055 126.795,58.055 126.527,57.787
ADC10B_GPA2: C22.2 J9.7 R45.2 R46.2 U6.B13 | length 78.1
  Top Layer w0.25: C22.2@129.355,66.03 132.43,62.955 136.315,62.955 J9.7@137.395,61.875
  MidLayer1 w0.1: U6.B13@77.9,51 78.3,50.6 79.1,50.6 80.302,49.398 113.748,49.398 v1(122.495,58.145)
  Bottom Layer w0.1: R46.2@124.927,60.242 R46.2@124.995,60.31 ; 126.527,62.587 126.527,62.623
  Bottom Layer w0.25: v1(122.495,58.145) 124.592,60.242 R46.2@124.927,60.242 ; R46.2@124.995,60.31 124.995,61.055 126.527,62.587 ; R45.2@126.527,63.417 126.527,62.623 128.595,60.555 136.075,60.555 J9.7@137.395,61.875
ADC10B_GPA3: C23.2 J9.9 R44.1 R45.1 U6.C14 | length 81.2
  Top Layer w0.25: C23.2@131.895,66.03 131.895,64.955 133.495,63.355 136.335,63.355 J9.9@137.395,64.415
  MidLayer1 w0.1: U6.C14@77.1,50.2 77.5,50.6 77.5,50.834 77.5,51.166 77.734,51.4 79,51.4 80.702,49.698 110.798,49.698 110.8,49.7 112.75,49.7 v1(122.495,59.445)
  Bottom Layer w0.25: v1(122.495,59.445) 123.795,60.745 123.795,62.285 R45.1@124.927,63.417 124.927,64.187 ; R44.1@124.927,66.792 124.927,64.187 ; J9.9@137.395,64.415 136.035,63.055 129.295,63.055 127.295,65.055 125.795,65.055 124.927,64.187
AGND: C20.1 C21.1 C22.1 C23.1 C24.1 C25.1 C26.1 FB5.2 J9.4 J9.6 J9.8 J9.10 R48.1 U6.A12 | length 105.2
  Top Layer w0.1: C26.1@126.755,60.655 C26.1@126.755,60.905
  Top Layer w0.25: FB5.2@122.425,61.29 122.425,63.265 ; C24.1@126.755,54.305 C25.1@126.755,57.48 C26.1@126.755,60.655 ; C26.1@126.755,60.905 123.895,63.765 122.925,63.765 122.425,63.265 ; J9.10@134.855,64.415 134.855,65.595 132.92,67.53 C23.1@131.895,67.53 C22.1@129.355,67.53 C21.1@126.815,67.53 C20.1@124.275,67.53 123.57,67.53 122.425,66.385 122.425,63.265
  MidLayer1 w0.1: U6.A12@78.7,51.8 79,51.8 80.802,49.998 111.133,49.998 FB5.2@122.425,61.29
  MidLayer1 w0.25: J9.4@134.855,56.795 J9.6@134.855,59.335 J9.8@134.855,61.875 J9.10@134.855,64.415
  Bottom Layer w0.25: FB5.2@122.425,61.29 120.995,59.86 120.995,53.045 121.995,52.045 125.695,52.045 126.527,52.877 R48.1@126.527,53.892
ARM_TDO: U5.1 U6.E11 | length 44.1
  Top Layer w0.25: U5.1@37.05,54.7 37.05,55.55 v1(38,56.5)
  MidLayer1 w0.1: v1(38,56.5) 42.8,51.7 65.2,51.7 68.1,54.6 74.1,54.6 75.1,53.6 75.1,53 U6.E11@75.5,52.6
CLK_256FS_O: R28.1 TP10.1 | length 3.2
  Top Layer w0.25: TP10.1@67.2,35.5 R28.1@67.2,38.7
CLOCK_OUT: R29.1 TP11.1 | length 2.1
  Bottom Layer w0.1: TP11.1@67,68.1 TP11.1@67.1,68.2 ; TP11.1@67,68.7 TP11.1@67.1,68.8
  Bottom Layer w0.25: R29.1@67,66.3 TP11.1@67,68.1
CSC_3V3: J1.2 JP2.3 | length 27.5
  Bottom Layer w0.25: JP2.3@32.98,108.9 44.7,108.9 52.5,116.7 55.21,116.7 J1.2@56.63,115.28
CSC_5V: J1.1 JP1.3 | length 26.5
  Bottom Layer w0.25: JP1.3@32.98,101.6 40.18,101.6 J1.1@53.86,115.28
EBI_A0: U6.B3 U9.23 U10.17 U11.17 | length 111.4
  Top Layer w0.1: U9.23@43.438,69.685 46.985,69.685 v1(47,69.7) ; v1(79.7,71.4) 81.8,71.4 89.4,79 103,79 105.3,81.3 v1(105.3,84.9) 103.934,86.266 U11.17@102.244,86.266 ; U10.17@102.25,100.55 104.45,100.55 v1(105,100)
  Bottom Layer w0.1: v1@46.985,69.685 v1(47,69.7) 47.6,69.7 49.3,71.4 v1@79.6,71.4 ; U6.B3@77.9,59 78.3,58.6 80.546,58.6 83.1,61.154 83.1,68.7 80.4,71.4 v1(79.7,71.4) ; v1(105,100) 103.9,98.9 103.9,86.3 v1(105.3,84.9)
EBI_A1: U6.A2 U9.24 U10.16 U11.16 | length 111.6
  Top Layer w0.1: U9.24@43.438,68.885 45.985,68.885 v1(46,68.9) ; v1(80.6,69.8) 80.9,69.8 89.6,78.5 103.5,78.5 106.6,81.6 106.6,84.9 ; U11.16@102.244,86.766 104.734,86.766 106.6,84.9 ; U10.16@102.25,101.05 105.35,101.05 106.6,99.8 106.6,84.9
  Bottom Layer w0.1: v1@45.985,68.885 v1(46,68.9) 47.2,68.9 49,70.7 79.7,70.7 v1(80.6,69.8) 82.8,67.6 82.8,61.207 81.393,59.8 U6.A2@78.7,59.8
EBI_A2: U6.N6 U9.25 | length 36.3
  Top Layer w0.1: U9.25@43.438,68.085 46.115,68.085 v1(46.5,67.7) ; v1(59.6,63.6) 59.6,62.4 60.7,61.3 60.7,56.9 v1(60.1,56.3) ; v1(62.6,55.6) 63.9,55.6 65.2,56.9 67.8,56.9 67.9,57 68.8,57 69.1,56.7 U6.N6@69.1,56.6
  MidLayer1 w0.1: v1(46.5,67.7) 46.5,67.4 50.3,63.6 v1(59.6,63.6)
  Bottom Layer w0.1: v1(60.1,56.3) 60.8,55.6 v1(62.6,55.6)
EBI_A3: U6.P6 U9.26 | length 36.6
  Top Layer w0.1: U9.26@43.438,67.285 45.315,67.285 v1(46,66.6) ; v1@59.85,54.95 61,56.1 61,62.3 v1(60.6,62.7) ; v1(61.6,54.9) 63.6,54.9 65.3,56.6 U6.P6@68.3,56.6
  MidLayer1 w0.1: v1(46,66.6) 49.9,62.7 v1(60.6,62.7)
  Bottom Layer w0.1: v1(59.9,54.9) v1(61.6,54.9)
EBI_A4: U6.N7 U9.29 | length 27.2
  Top Layer w0.1: U9.29@54.738,67.285 58.715,67.285 v1(59,67)
  MidLayer1 w0.1: v1(59,67) 61.6,64.4 61.6,55.9 60.9,55.2 60.9,54.5 61.2,54.2 63.3,54.2 64.5,55.4 68.7,55.4 U6.N7@69.1,55.8
EBI_A5: U6.P7 U9.30 | length 27.9
  Top Layer w0.1: U9.30@54.738,68.085 59.015,68.085 61.3,65.8 61.3,56 60.6,55.3 60.6,54.469 61.169,53.9 63.4,53.9 65.3,55.8 U6.P7@68.3,55.8
EBI_A6: U6.K6 U9.31 | length 27.6
  Top Layer w0.1: U9.31@54.738,68.885 59.015,68.885 61.9,66 61.9,59 v1(62.3,58.6)
  MidLayer1 w0.1: v1(62.3,58.6) 71.7,58.6 71.9,58.4 71.9,57 U6.K6@71.5,56.6
EBI_A7: U6.P5 U9.32 | length 23.1
  Top Layer w0.1: U9.32@54.738,69.685 59.015,69.685 62.2,66.5 62.2,59.8 63.7,58.3 63.7,57.7 64.25,57.15 65.25,57.15 65.5,57.4 U6.P5@68.3,57.4
EBI_A8: U6.N5 U9.33 | length 24.6
  Top Layer w0.1: U9.33@54.738,70.485 59.015,70.485 62.5,67 62.5,59.9 64,58.4 64,57.851 64.451,57.4 65.1,57.4 65.5,57.8 68.7,57.8 U6.N5@69.1,57.4
EBI_A9: U6.L5 U9.34 | length 27.8
  Top Layer w0.1: U9.34@54.738,71.285 58.815,71.285 62.8,67.3 62.8,62 v1(63.2,61.6)
  MidLayer1 w0.1: v1(63,57.6) 63.6,57 70.3,57 U6.L5@70.7,57.4
  Bottom Layer w0.1: v1(63,57.6) 63,61.4 v1(63.2,61.6)
EBI_A10: U6.K7 U9.22 | length 39.1
  Top Layer w0.1: U9.22@43.438,70.485 45.985,70.485 v1(46,70.5)
  MidLayer1 w0.1: v1@45.985,70.485 v1(46,70.5) 57,70.5 62.5,65 62.5,61 63.1,60.4 v1(63.7,60.4) ; v1@63.7,56.2 71.1,56.2 U6.K7@71.5,55.8
  Bottom Layer w0.1: v1@63.7,56.2 v1(63.6,56.3) 63.6,57.949 63.5,58.048 63.5,59.7 63.7,59.9 v1(63.7,60.4)
EBI_A11: U6.N4 U9.35 | length 24.6
  Top Layer w0.1: U9.35@54.738,72.085 58.615,72.085 63.1,67.6 63.1,62.8 64.4,61.5 64.4,60 64.1,59.7 v1(64.1,59.3) ; v1(65.7,59.3) 66.4,58.6 68.7,58.6 U6.N4@69.1,58.2
  Bottom Layer w0.1: v1(64.1,59.3) v1(65.7,59.3)
EBI_A12: U6.K5 U9.36 | length 28.2
  Top Layer w0.1: U9.36@54.738,72.885 58.415,72.885 63.4,67.9 63.4,62.9 64.7,61.6 v1(64.7,58)
  MidLayer1 w0.1: v1(64.7,58) 64.9,57.8 71.1,57.8 U6.K5@71.5,57.4
EBI_A13: U6.P4 U9.20 | length 34.3
  Top Layer w0.1: U9.20@43.438,72.085 45.985,72.085 v1(46,72.1) ; v1(64.2,65.2) 63.7,64.7 63.7,63 65,61.7 65,58.9 65.7,58.2 U6.P4@68.3,58.2
  MidLayer1 w0.1: v1@45.985,72.085 v1(46,72.1) 57,72.1 63.9,65.2 v1(64.2,65.2)
EBI_A14: U6.P3 U9.21 | length 31.3
  Top Layer w0.1: U9.21@43.438,71.285 46.985,71.285 v1(47,71.3) ; v1(64.4,63.8) 65.4,62.8 65.4,60.5 66.9,59 U6.P3@68.3,59
  MidLayer1 w0.1: v1@46.985,71.285 v1(47,71.3) 56.9,71.3 v1(64.4,63.8)
EBI_A15: U6.N3
EBI_CKE: U6.L8 U9.37 | length 38.5
  Top Layer w0.1: U9.37@54.738,73.685 53.385,73.685 52.9,73.2 52.9,65.9 53.6,65.2 56.4,65.2 60.1,61.5 60.1,57.4 59.2,56.5 59.2,54.6 60.2,53.6 63.5,53.6 65.3,55.4 70.3,55.4 U6.L8@70.7,55
EBI_CLKOUT: U6.N8 U9.38 | length 36.9
  Top Layer w0.1: U9.38@54.738,74.485 53.085,74.485 52.5,73.9 52.5,65.6 57.7,60.4 57.7,54.9 59.85,52.75 63.45,52.75 65.3,54.6 68.7,54.6 U6.N8@69.1,55
EBI_D0: R95.2 U6.G2 U10.29 U11.29 | length 112.4
  Top Layer w0.1: v1(116,98.1) 116.95,99.05 U10.29@121.55,99.05 ; v1(116.3,84.1) 116.966,84.766 U11.29@121.544,84.766
  MidLayer1 w0.1: U6.G2@73.9,59.8 74.3,60.2 74.3,77 75.4,78.1 v1(83.5,78.1) ; v1(116,98.1) 115,97.1 115,91.3 116.3,90 v1(116.3,84.1)
  Bottom Layer w0.1: R95.2@54.7,86.5 65.4,86.5 v1(74.6,77.3) ; v1(83.5,78.1) 85.4,80 108.4,80 112.5,84.1 v1(116.3,84.1)
EBI_D1: R96.2 U6.F2 U10.30 U11.30 | length 119
  Top Layer w0.1: v1(115.1,98.9) 115.75,99.55 U10.30@121.55,99.55 ; v1(115.3,84.8) 115.766,85.266 U11.30@121.544,85.266
  MidLayer1 w0.1: U6.F2@74.7,59.8 75.1,60.2 75.1,74.5 76.2,75.6 v1(76.2,76.3) 80.1,76.3 80.5,76.7 v1(83.1,76.7) ; v1(115.1,98.9) 114.5,98.3 114.5,91.2 115.3,90.4 v1(115.3,84.8)
  Bottom Layer w0.1: R96.2@50.2,85.3 64.9,85.3 73.9,76.3 v1(76.2,76.3) ; v1(83.1,76.7) 83.1,77.4 82.7,77.8 82.7,78.6 84.6,80.5 108.4,80.5 112.7,84.8 v1(115.3,84.8)
EBI_D2: R97.2 U6.F1 U10.31 U11.31 | length 112.8
  Top Layer w0.1: v1(114.2,99.7) 114.55,100.05 U10.31@121.55,100.05 ; v1(114.3,85.5) 114.566,85.766 U11.31@121.544,85.766
  MidLayer1 w0.1: U6.F1@74.7,60.6 74.7,75.2 v1(75.1,75.6) 75.1,76.2 76.3,77.4 v1(82,77.4) ; v1(114.2,99.7) 114,99.5 114,85.8 v1(114.3,85.5)
  Bottom Layer w0.1: R97.2@54.7,84 65.7,84 74.1,75.6 v1(75.1,75.6) ; v1(82,77.4) 82,78.8 84.2,81 108.4,81 112.9,85.5 v1(114.3,85.5)
EBI_D3: R98.2 U6.E1 U10.32 U11.32 | length 118.7
  Top Layer w0.1: v1(113.3,86.2) 113.366,86.266 U11.32@121.544,86.266 ; v1(113.3,100.5) 113.35,100.55 U10.32@121.55,100.55
  MidLayer1 w0.1: U6.E1@75.5,60.6 75.5,74.1 76.3,74.9 v1(76.6,74.9) 79.7,74.9 80.8,76 v1(81.3,76) ; v1(113.3,86.2) v1(113.3,100.5)
  Bottom Layer w0.1: R98.2@50.2,82.8 66.4,82.8 74.3,74.9 v1(76.6,74.9) ; v1(81.3,76) 81.1,76.2 81.1,78.7 83.9,81.5 108.3,81.5 113,86.2 v1(113.3,86.2)
EBI_D4: R99.2 U6.E2 U10.41 U11.41 | length 118.2
  Top Layer w0.1: v1(119,89.5) 119,89.7 120.066,90.766 U11.41@121.544,90.766 ; v1(119,103.7) 119,103.8 120.25,105.05 U10.41@121.55,105.05
  MidLayer1 w0.1: U6.E2@75.5,59.8 75.9,60.2 75.9,73.7 76.4,74.2 v1(77.8,74.2) 79.8,74.2 80.8,75.2 v1(83.5,75.2) ; v1(119,89.5) v1(119,103.7)
  Bottom Layer w0.1: R99.2@54.7,81.5 67.2,81.5 74.5,74.2 v1(77.8,74.2) ; v1(83.5,75.2) 80.9,75.2 80.6,75.5 80.6,79 83.6,82 107.9,82 115.4,89.5 v1(119,89.5)
EBI_D5: R100.2 U6.D1 U10.42 U11.42 | length 120.2
  Top Layer w0.1: v1(118,90.2) 119.066,91.266 U11.42@121.544,91.266 ; v1(118.1,104.5) 119.15,105.55 U10.42@121.55,105.55
  MidLayer1 w0.1: U6.D1@76.3,60.6 76.3,73 v1(76.8,73.5) 80.1,73.5 80.8,74.2 v1(82.8,74.2) ; v1(118,90.2) v1@118,104.4
  Bottom Layer w0.1: R100.2@50.2,80.3 67.9,80.3 74.7,73.5 v1(76.8,73.5) ; v1(82.8,74.2) 81.4,74.2 80.3,75.3 80.3,79.5 83.3,82.5 107.9,82.5 115.6,90.2 v1(118,90.2)
EBI_D6: R101.2 U6.D2 U10.43 U11.43 | length 117.4
  Top Layer w0.1: v1(117,90.9) 117.866,91.766 U11.43@121.544,91.766 ; v1(117.2,105.3) 117.95,106.05 U10.43@121.55,106.05
  MidLayer1 w0.1: U6.D2@76.3,59.8 76.7,60.2 ; 76.7,60.2 76.7,72.4 77.2,72.9 v1(77.8,72.9) 80.5,72.9 80.8,73.2 v1(82.1,73.2) ; v1(117,90.9) 117.2,91.1 v1(117.2,105.3)
  Bottom Layer w0.1: R101.2@54.7,79 68.7,79 74.8,72.9 v1(77.8,72.9) ; v1(82.1,73.2) 81.9,73.2 80,75.1 80,79.9 83.1,83 107.9,83 115.8,90.9 v1(117,90.9)
EBI_D7: R102.2 U6.C1 U10.44 U11.44 | length 122
  Top Layer w0.1: v1(116,91.6) 116.666,92.266 U11.44@121.544,92.266 ; v1(116.1,105.9) 116.75,106.55 U10.44@121.55,106.55
  MidLayer1 w0.1: U6.C1@77.1,60.6 77.1,70.5 v1(78.8,72.2) v1(81.3,72.2) ; v1(116,91.6) 116.8,92.4 116.8,104.2 116.1,104.9 v1(116.1,105.9)
  Bottom Layer w0.1: R102.2@50.2,77.8 69.3,77.8 74.9,72.2 v1(78.8,72.2) ; v1(81.3,72.2) 81.3,73.2 79.5,75 79.5,80 83,83.5 107.9,83.5 v1(116,91.6)
EBI_D8: R103.2 U6.B1 | length 29.1
  Top Layer w0.1: R103.2@60.434,77.774 68.426,77.774 77.3,68.9 77.3,62.8 77.9,62.2 U6.B1@77.9,60.6
EBI_D9: R104.2 U6.A3 | length 27.8
  Top Layer w0.1: R104.2@64.409,79.044 67.556,79.044 77.6,69 77.6,63 78.3,62.3 78.3,59.4 U6.A3@78.7,59
EBI_D10: R105.2 U6.A1 | length 30.9
  Top Layer w0.1: R105.2@60.434,80.314 66.686,80.314 77.9,69.1 77.9,63.2 78.7,62.4 U6.A1@78.7,60.6
EBI_D11: R106.2 U6.C2 | length 31.5
  Top Layer w0.1: R106.2@64.409,81.584 65.916,81.584 78.6,68.9 v1(78.6,64)
  MidLayer1 w0.1: U6.C2@77.1,59.8 77.5,60.2 79.2,60.2 79.9,60.9 79.9,63.2 79.1,64 v1(78.6,64)
EBI_D12: R107.2 U6.G3 | length 38.3
  Top Layer w0.1: R107.2@60.434,82.854 65.046,82.854 79.2,68.7 v1(79.2,62.9)
  Bottom Layer w0.1: U6.G3@73.9,59 74.3,59.4 74.3,61.1 75.2,62 78.3,62 v1(79.2,62.9)
EBI_D13: R108.2 U6.D3 | length 35.4
  Top Layer w0.1: R108.2@64.409,84.124 65.676,84.124 66.5,83.3 66.5,81.8 79.9,68.4 v1(79.9,64.2)
  MidLayer1 w0.1: U6.D3@76.3,59 76.7,59.4 79.1,59.4 80.2,60.5 80.2,63.9 v1(79.9,64.2)
EBI_D14: R109.2 U6.E3 | length 43.8
  Top Layer w0.1: R109.2@60.434,85.394 65.506,85.394 67,83.9 67,81.7 80.6,68.1 v1(80.6,65.2)
  Bottom Layer w0.1: U6.E3@75.5,59 75.6,59 75.9,59.3 75.9,61 76.3,61.4 80.7,61.4 82,62.7 82,64.1 80.9,65.2 v1(80.6,65.2)
EBI_D15: R110.2 U6.F3 | length 40
  Top Layer w0.1: R110.2@64.409,86.664 65.136,86.664 67.5,84.3 67.5,81.7 81.3,67.9 81.3,63.4 v1(81,63.1)
  Bottom Layer w0.1: U6.F3@74.7,59 75.1,59.4 75.1,61 75.8,61.7 79.6,61.7 v1(81,63.1)
EBI_DQM_0: U6.H1 U9.15 U10.8 U11.8 | length 105.9
  Top Layer w0.1: U9.15@43.438,76.085 v1(45.985,76.085) ; v1(69,76.1) 69.5,76.1 73,72.6 73,60.7 U6.H1@73.1,60.6 ; v1(96.8,89.5) 98.3,91 99.8,91 100,90.8 102.21,90.8 U11.8@102.244,90.766 ; v1(96.8,99) 96.8,102.4 99.45,105.05 U10.8@102.25,105.05
  MidLayer1 w0.1: v1(45.985,76.085) 46,76.1 v1(69,76.1) 70.3,77.4 70.3,84.1 v1(70.7,84.5) ; v1(96.8,89.5) v1(96.8,99)
  Bottom Layer w0.1: v1(70.7,84.5) 80.5,84.5 85.1,89.1 96.4,89.1 v1(96.8,89.5)
EBI_DQM_1: U6.N9 U9.39 | length 38.4
  Top Layer w0.1: U9.39@54.738,75.285 52.985,75.285 52.2,74.5 52.2,65.1 57.2,60.1 57.2,54.7 59.5,52.4 63.5,52.4 64.9,53.8 68.8,53.8 69.1,54.1 U6.N9@69.1,54.2
EBI_NCAS: U6.G1 U9.17 | length 40.2
  Top Layer w0.1: U9.17@43.438,74.485 45.985,74.485 v1(46,74.5)
  MidLayer1 w0.1: v1@45.985,74.485 v1(46,74.5) 66.7,74.5 73.5,67.7 73.5,61.7 73.9,61.3 U6.G1@73.9,60.6
EBI_NDYCS: U6.P8 U9.19 | length 37.5
  Top Layer w0.1: U9.19@43.438,72.885 46.615,72.885 v1(51.3,68.2) ; v1(58.5,55.5) 58.5,54.7 60,53.2 63.5,53.2 65.3,55 U6.P8@68.3,55
  Bottom Layer w0.1: v1(51.3,68.2) 51.3,66.6 58.5,59.4 v1(58.5,55.5)
EBI_NRAS: U6.H2 U9.18 | length 40.3
  Top Layer w0.1: U9.18@43.438,73.685 v1(46.985,73.685) v1@47,73.7
  MidLayer1 w0.1: v1(46.985,73.685) 47,73.7 66.9,73.7 73.1,67.5 73.1,61.5 73.5,61.1 73.5,60.2 U6.H2@73.1,59.8
EBI_NSTCS_0: U6.K8
EBI_NSTCS_1: U6.P9
EBI_NWE: U6.J2 U9.16 U10.18 U11.18 | length 102.2
  Top Layer w0.1: U9.16@43.438,75.285 46.985,75.285 v1(47,75.3) ; v1(69.6,75) 72.7,71.9 72.7,60.2 U6.J2@72.3,59.8 ; v1(97.9,87.9) 97.9,87.4 99.534,85.766 U11.18@102.244,85.766 ; v1(97.9,100) 97.95,100.05 U10.18@102.25,100.05
  MidLayer1 w0.1: v1@46.985,75.285 v1(47,75.3) 69.3,75.3 v1(69.6,75) 71,76.4 v1(71,82.6) ; v1(97.9,87.9) v1(97.9,100)
  Bottom Layer w0.1: v1(71,82.6) 80.7,82.6 86,87.9 v1(97.9,87.9)